# Altium PCB TIDA_010057.PcbDoc (part 1 of 9)
Units mil, origin at the board's own origin, x right, y up, seen from the top; angles counter-clockwise.
Board outline 1771.65 x 3543.31 mil, 12 copper layers (Top Layer, GND1, Signal Layer 1, GND2, POWER1, POWER2, GND4, POWER3, GND6, Signal Layer 2, GND7, Bottom Layer), stack 62.79 mil thick; 593 components, 374 nets, 1805 pads, 1029 vias.
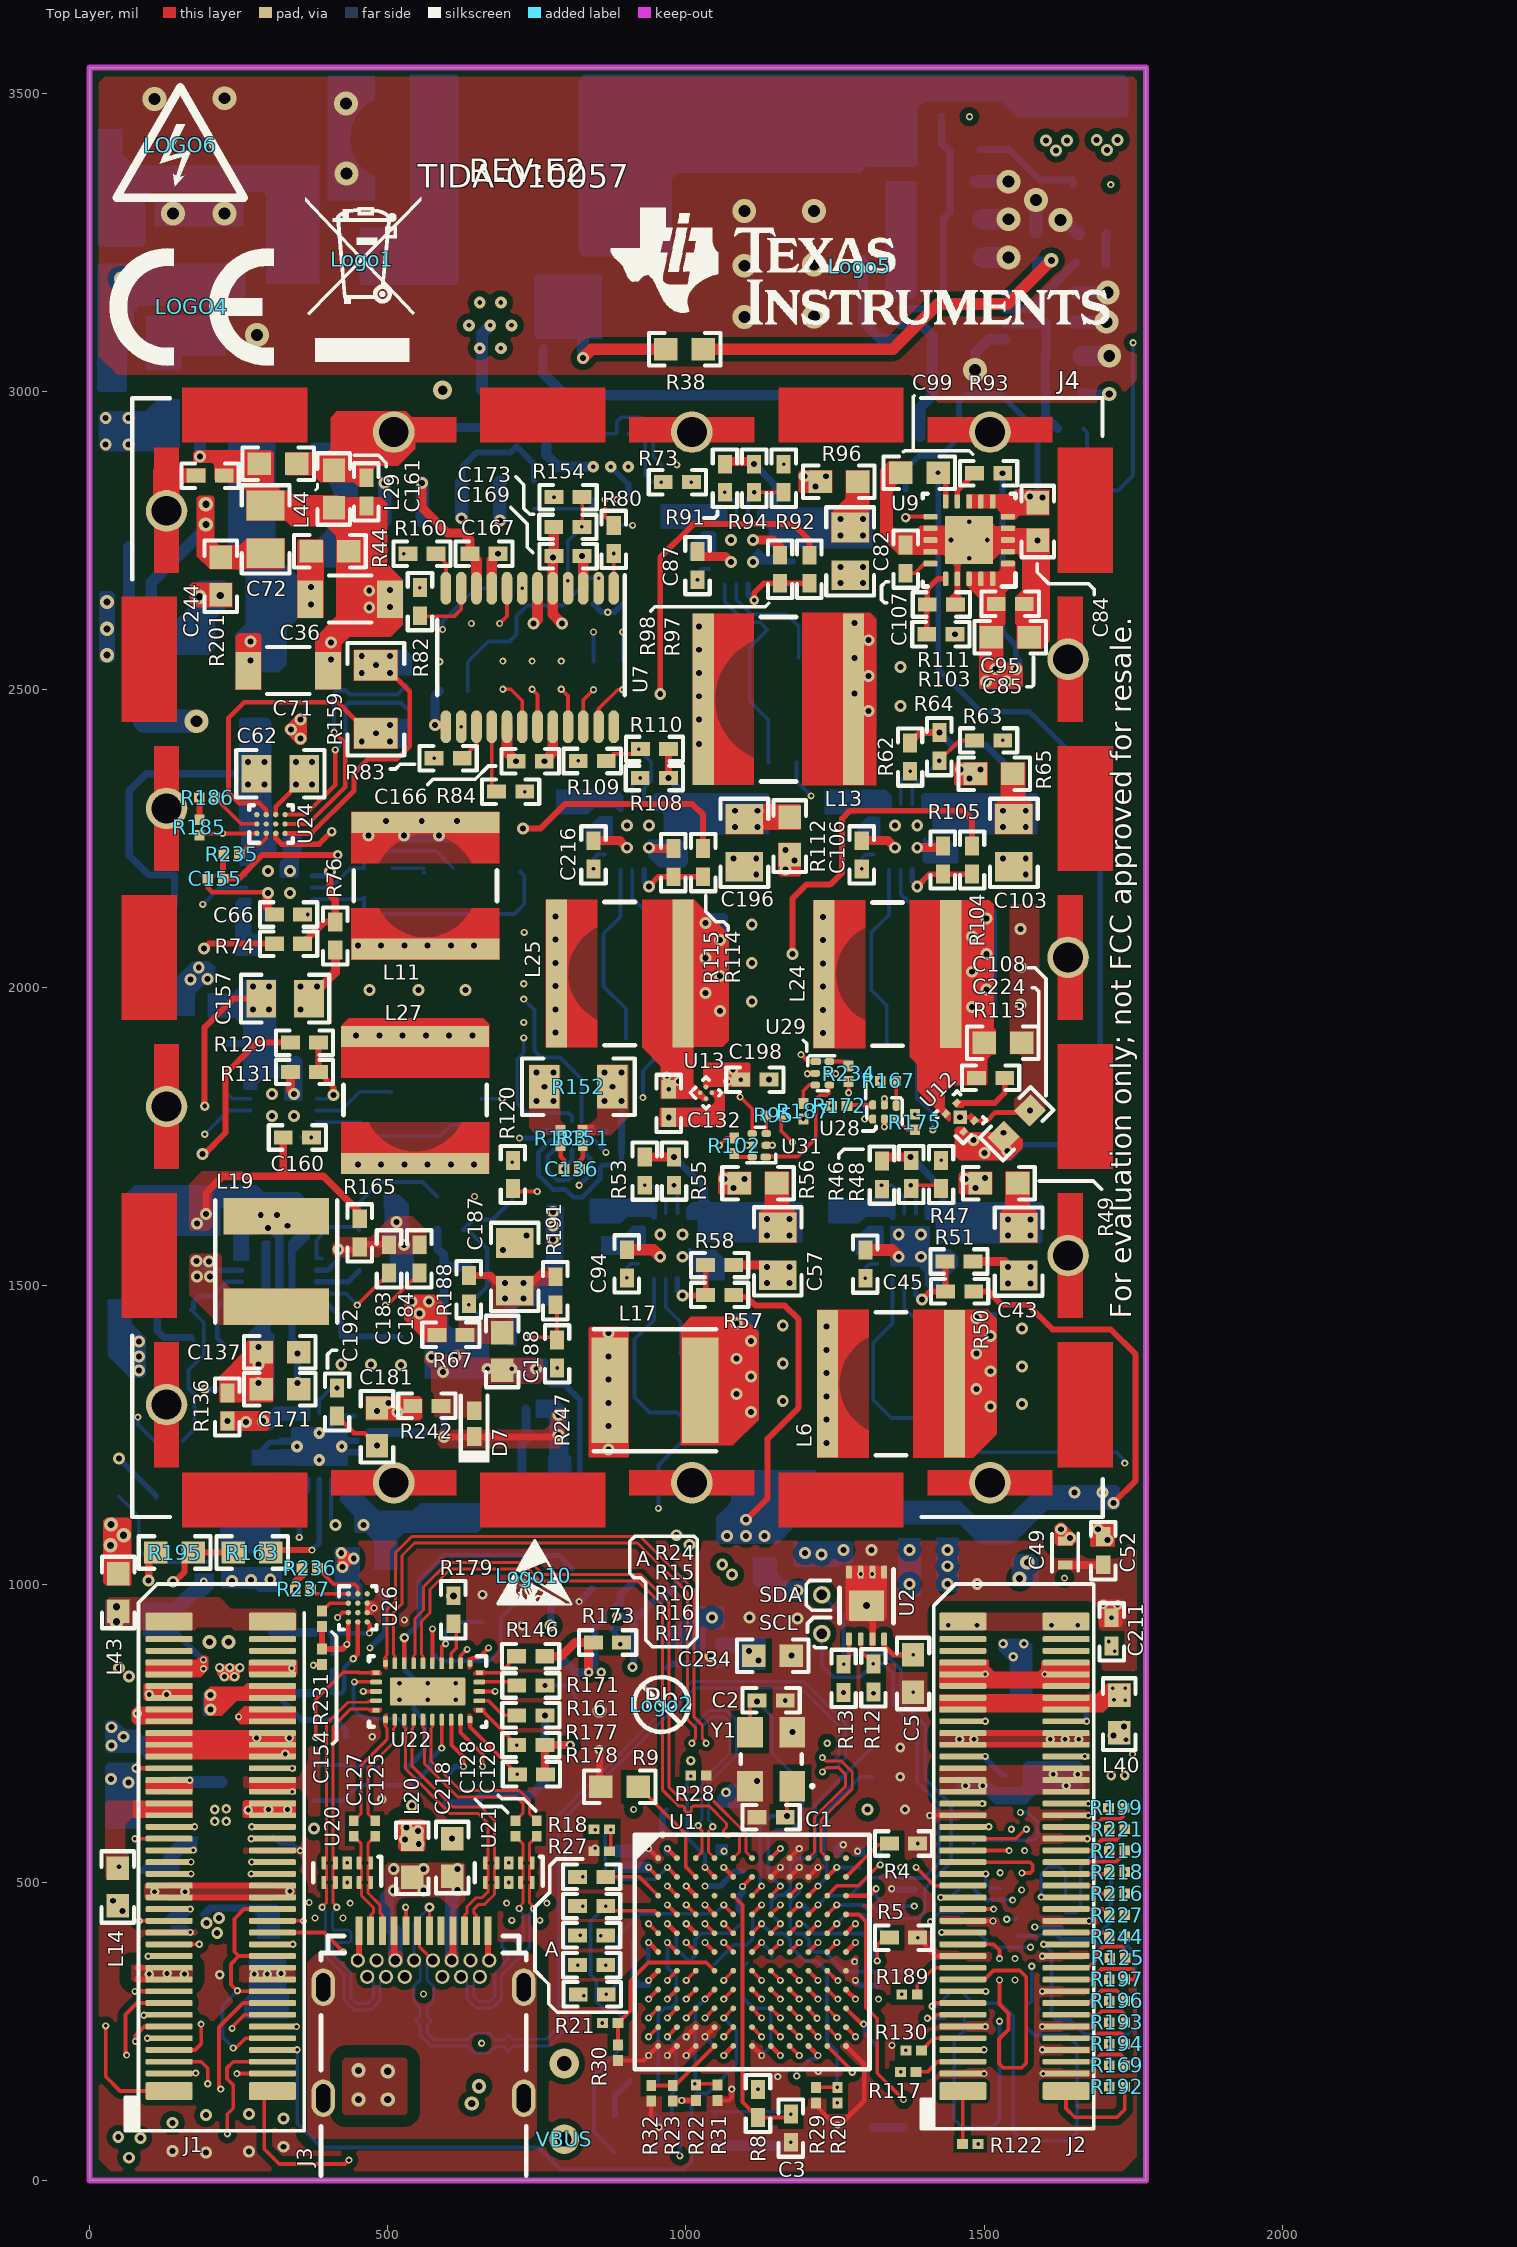
[diagram p0: Top Layer view]
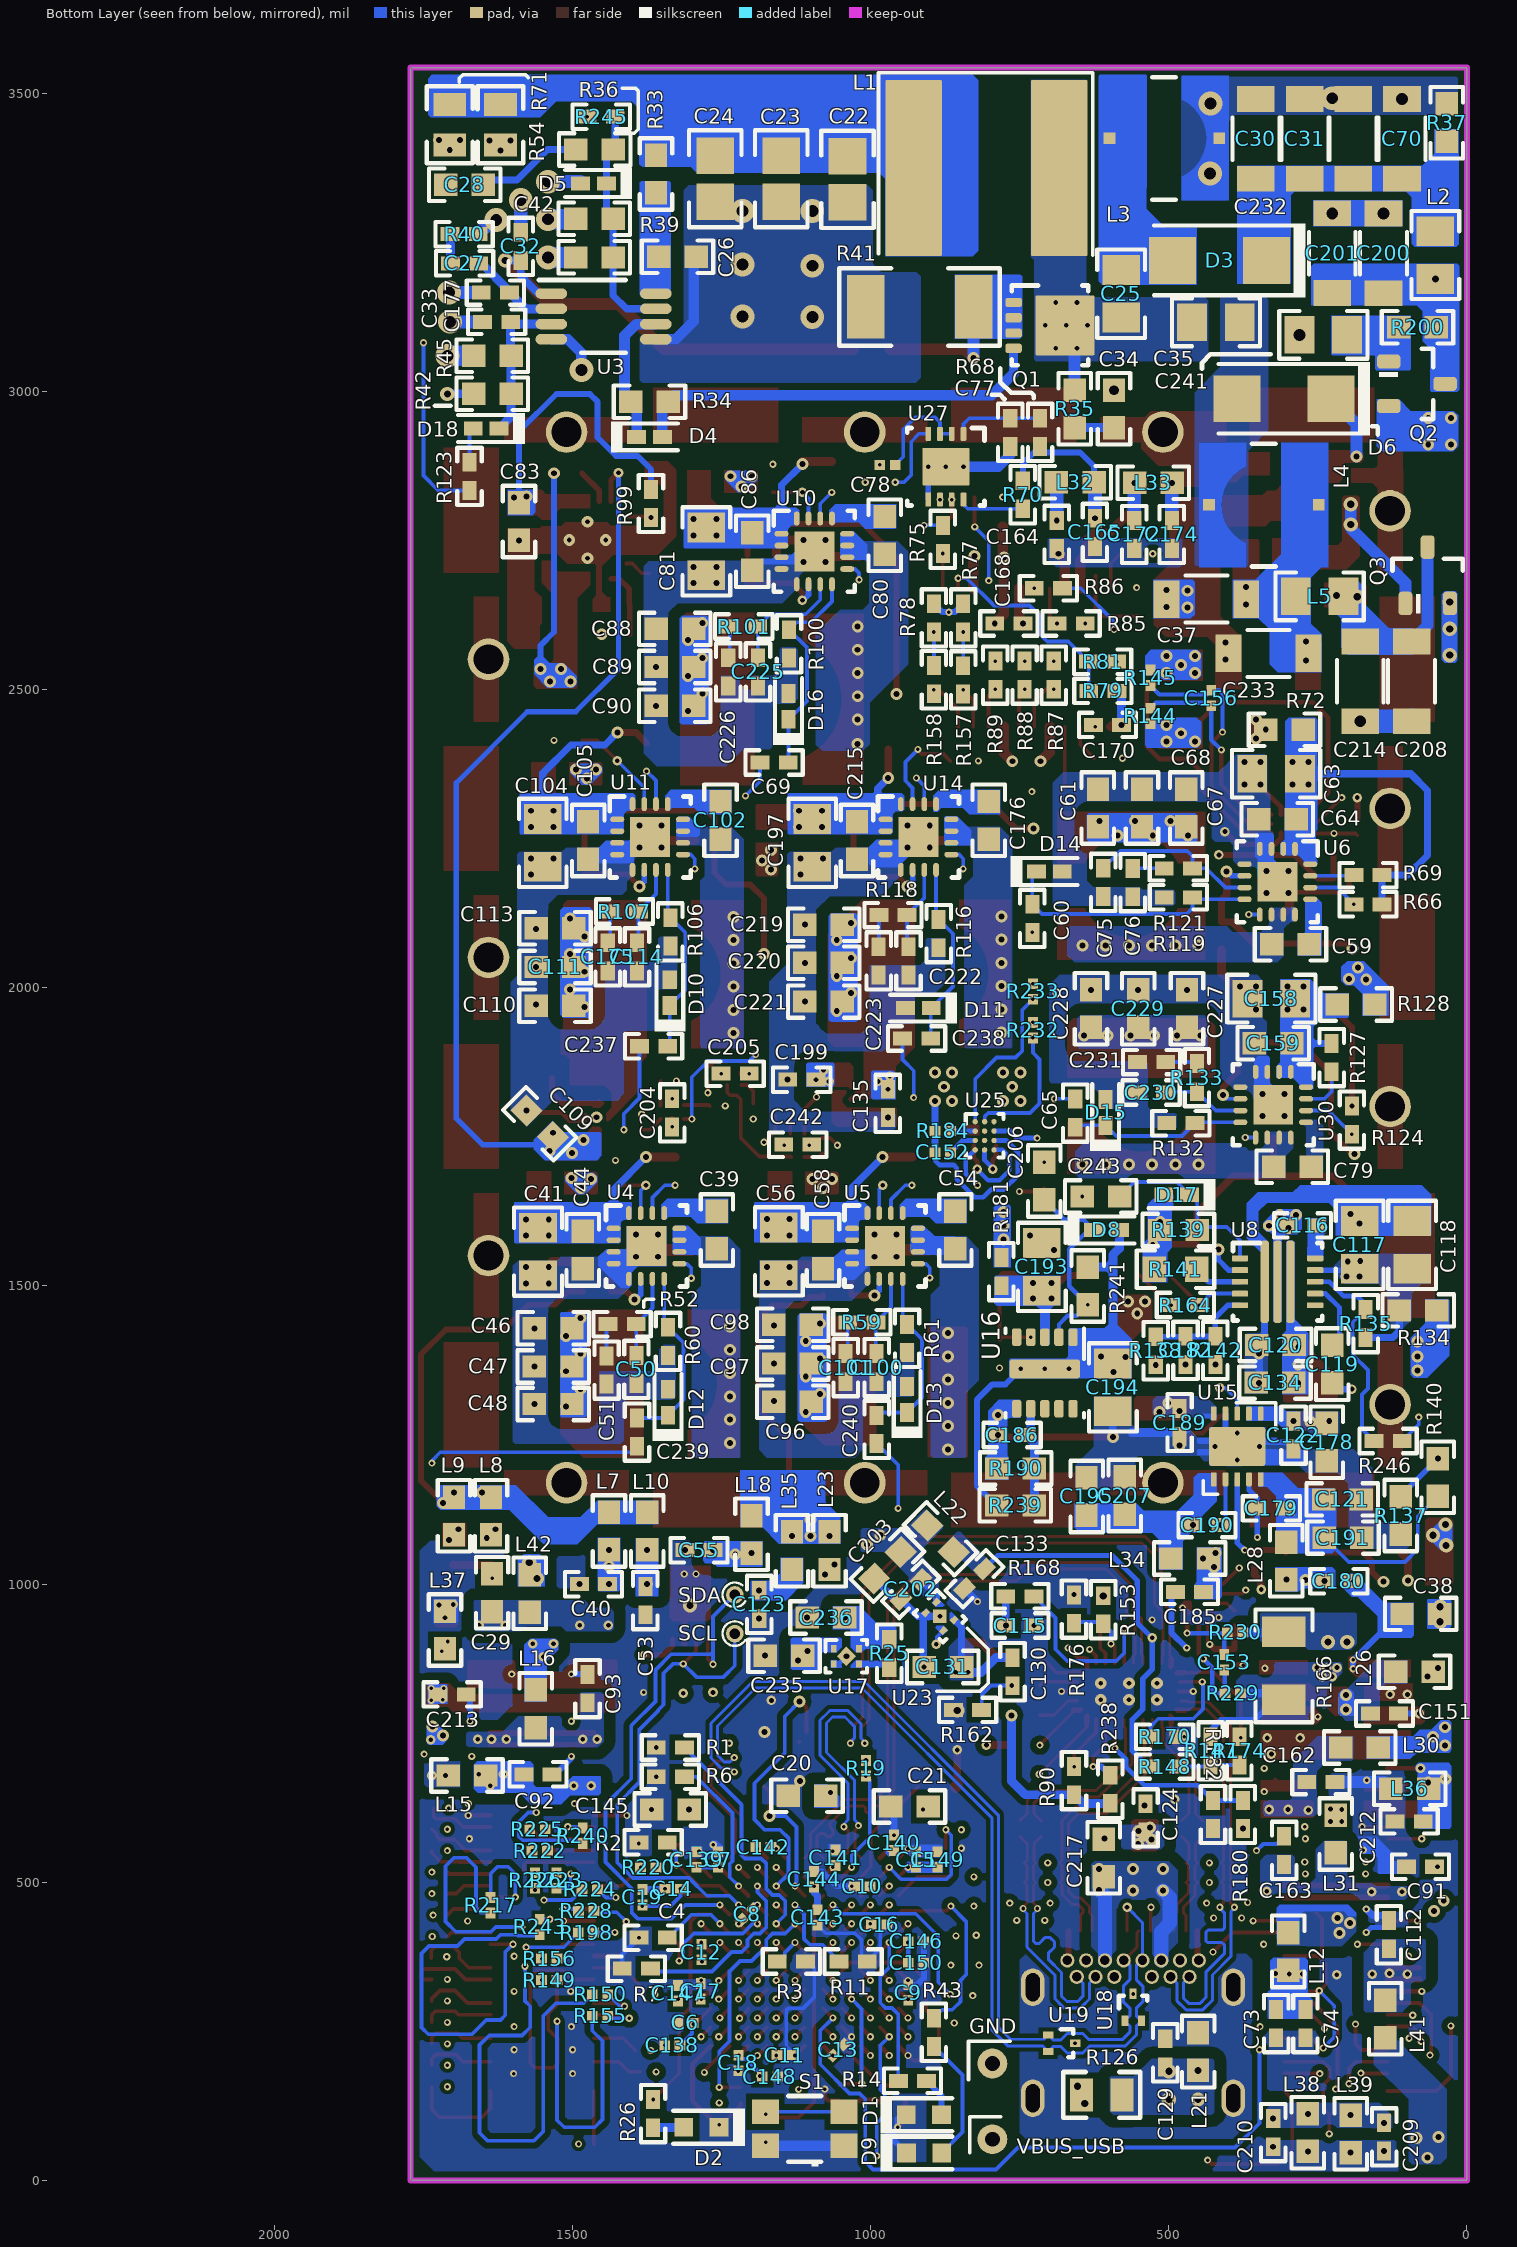
[diagram p1: Bottom Layer view, seen from below]
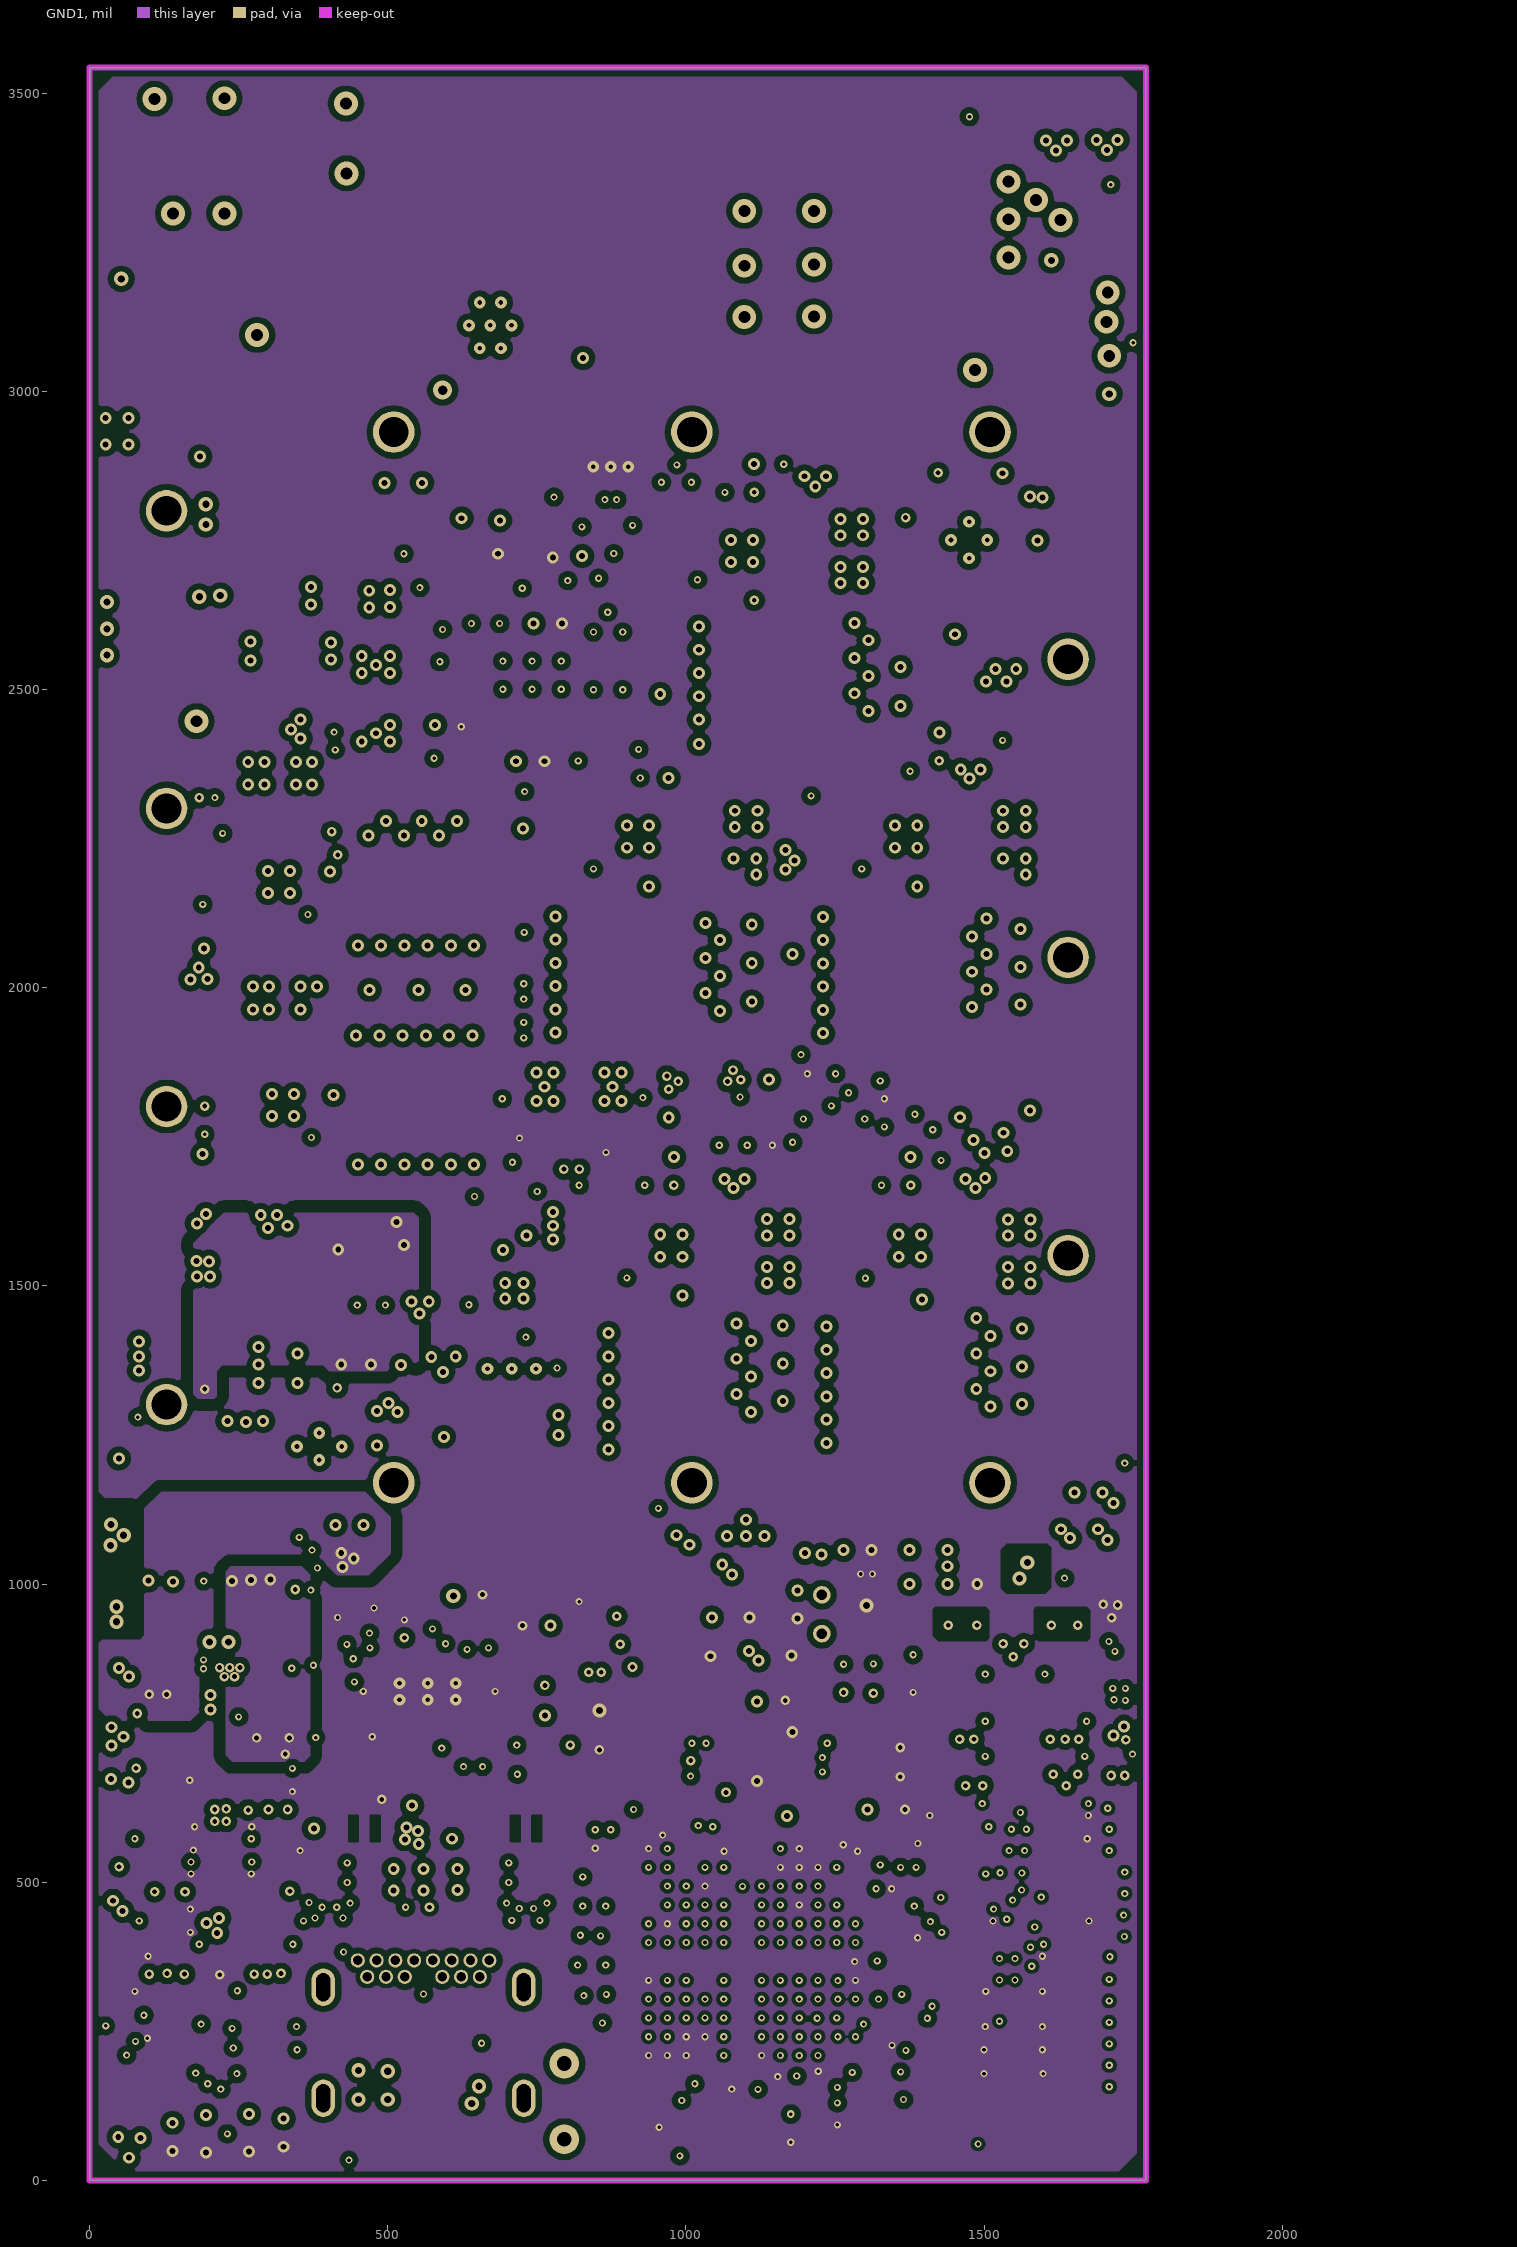
[diagram p2: GND1]
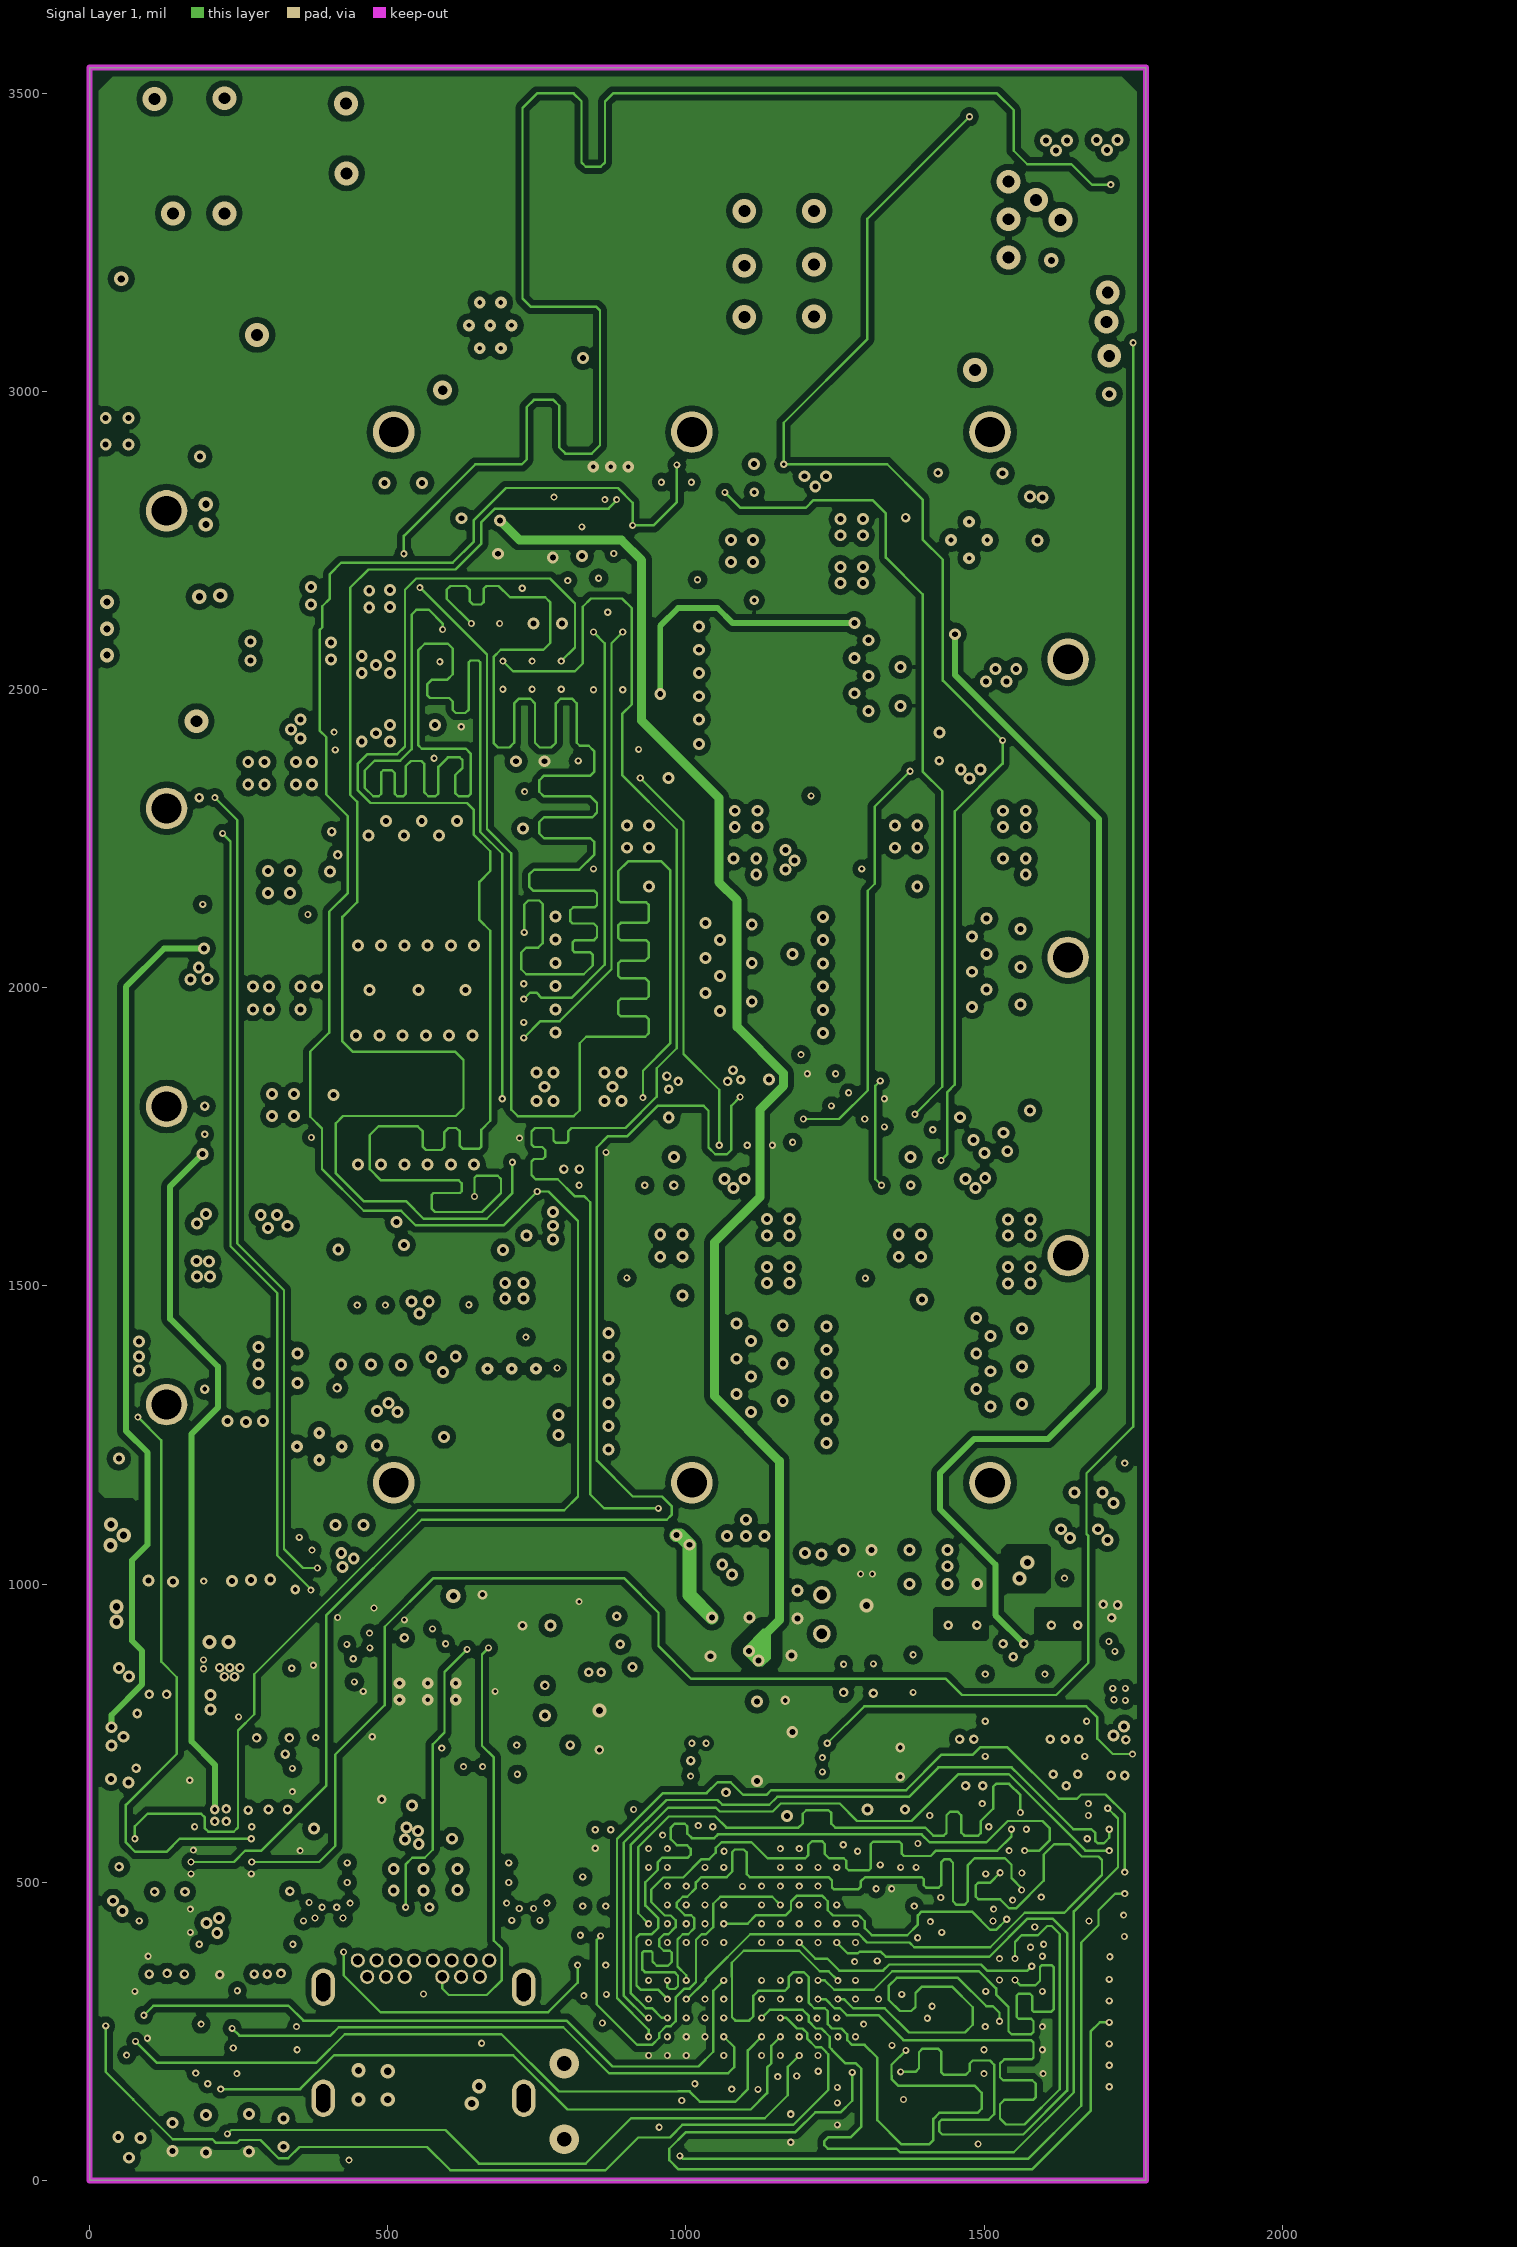
[diagram p3: Signal Layer 1]
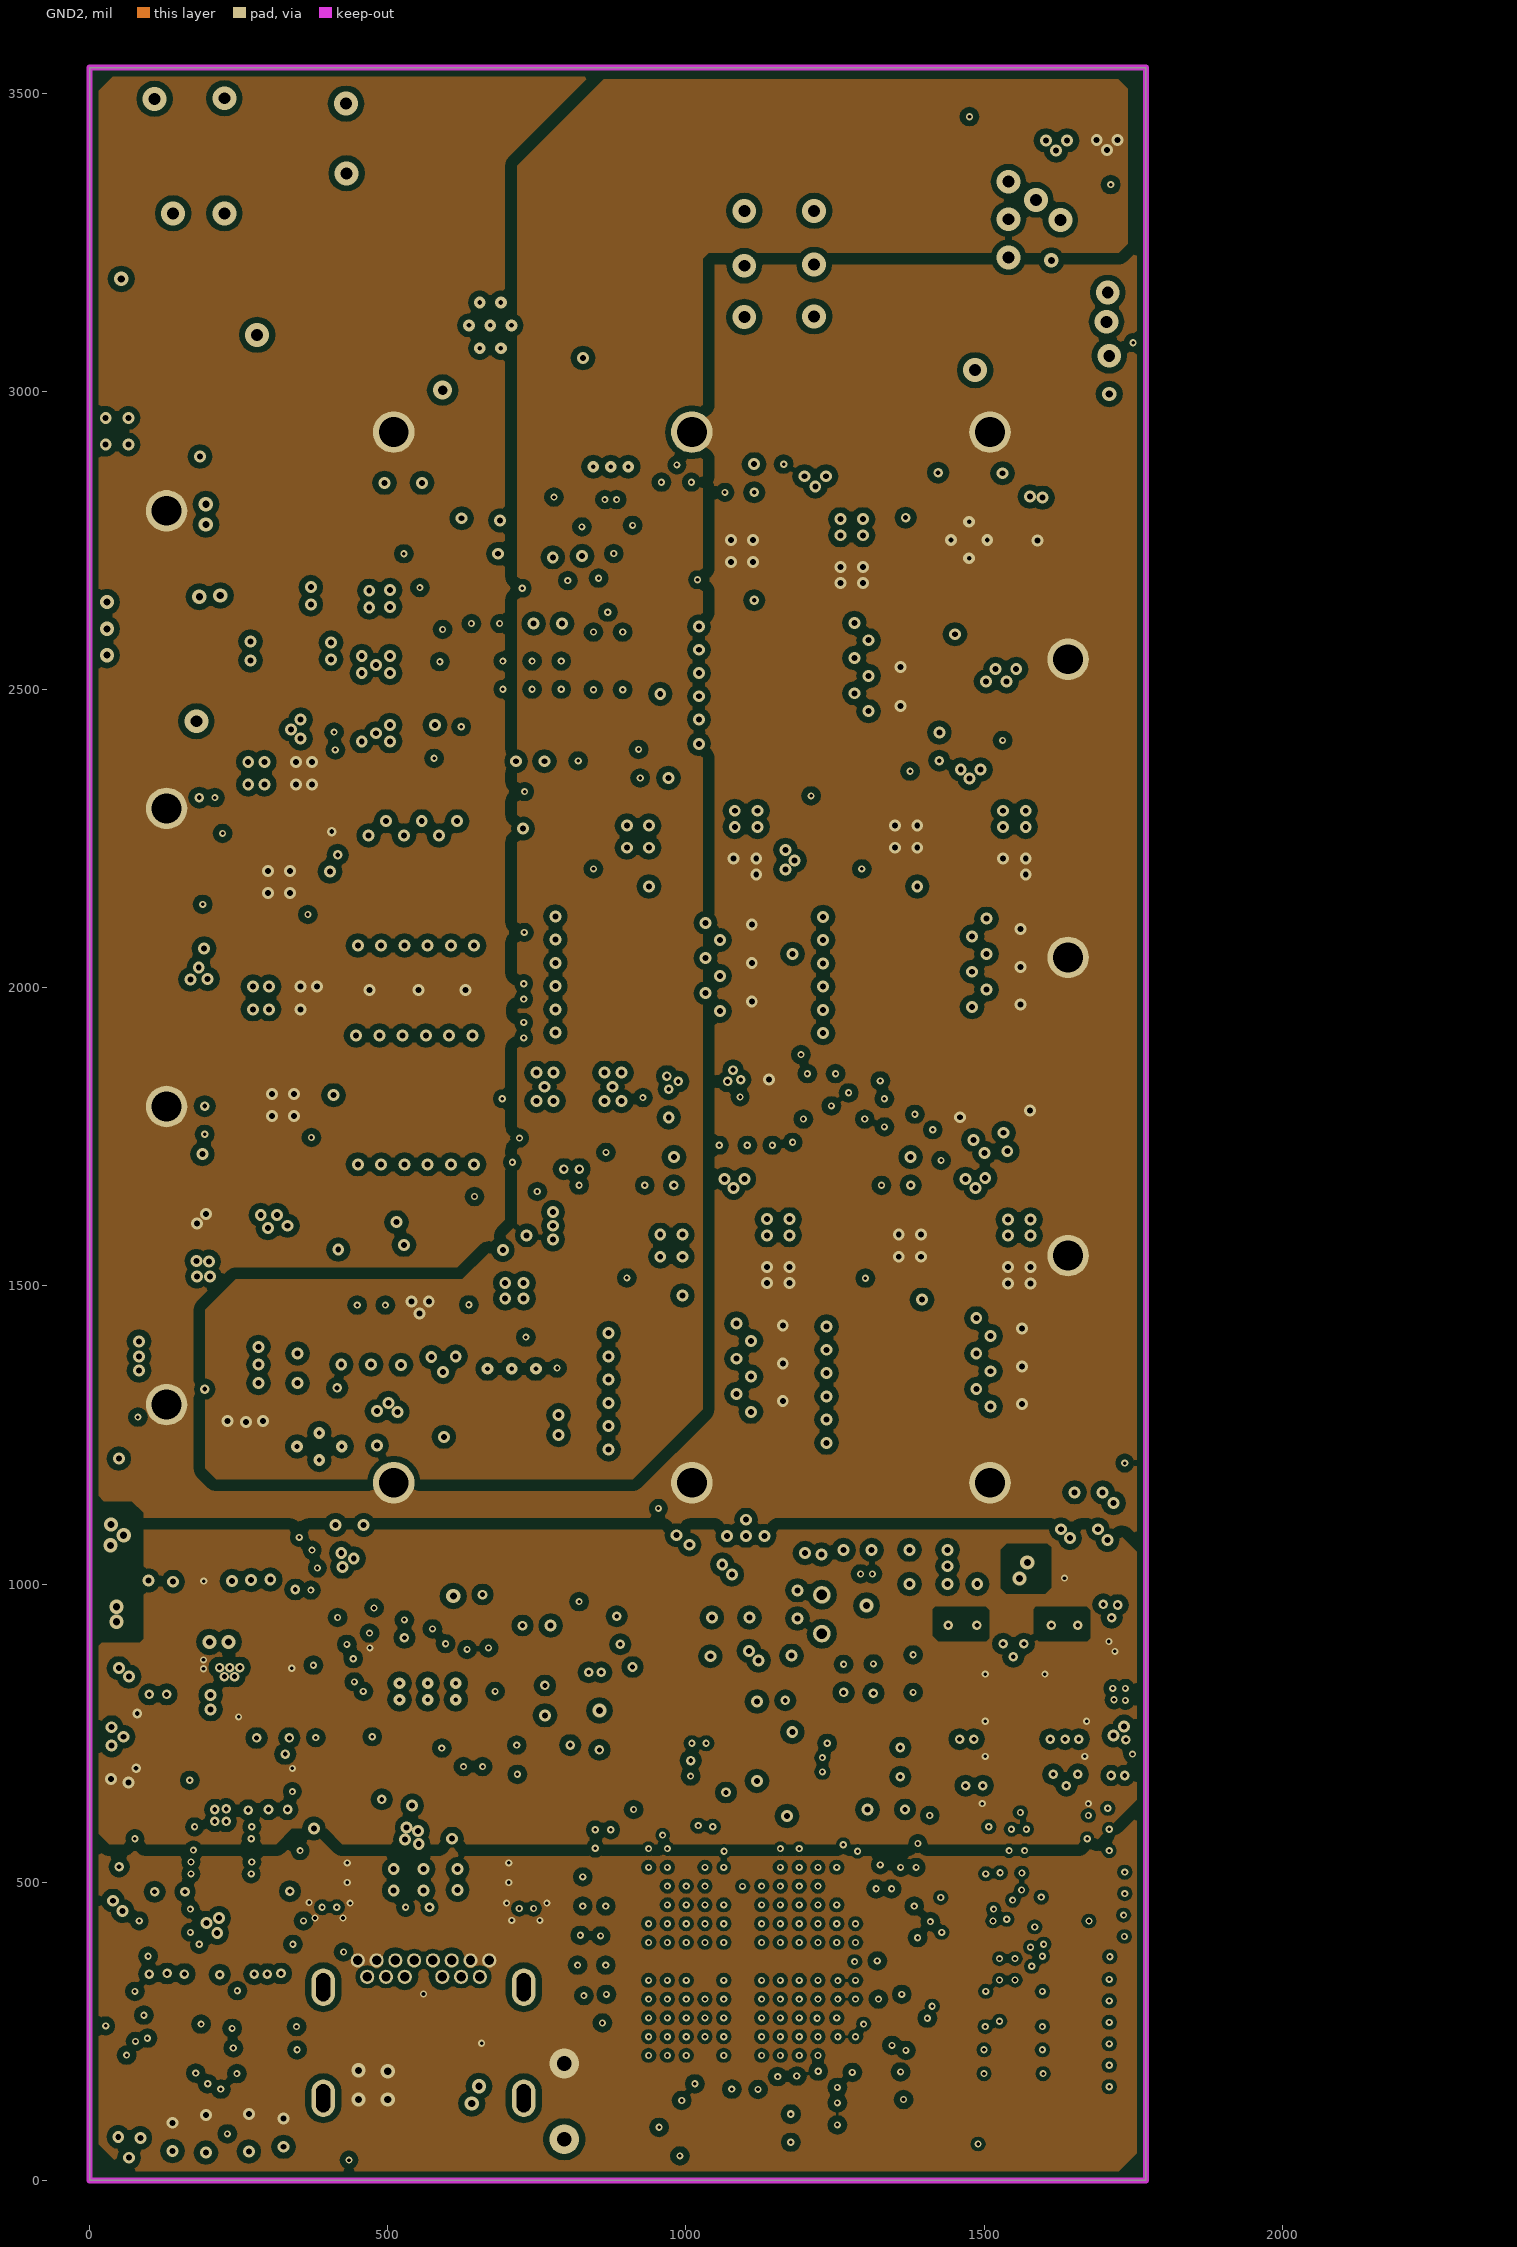
[diagram p4: GND2]
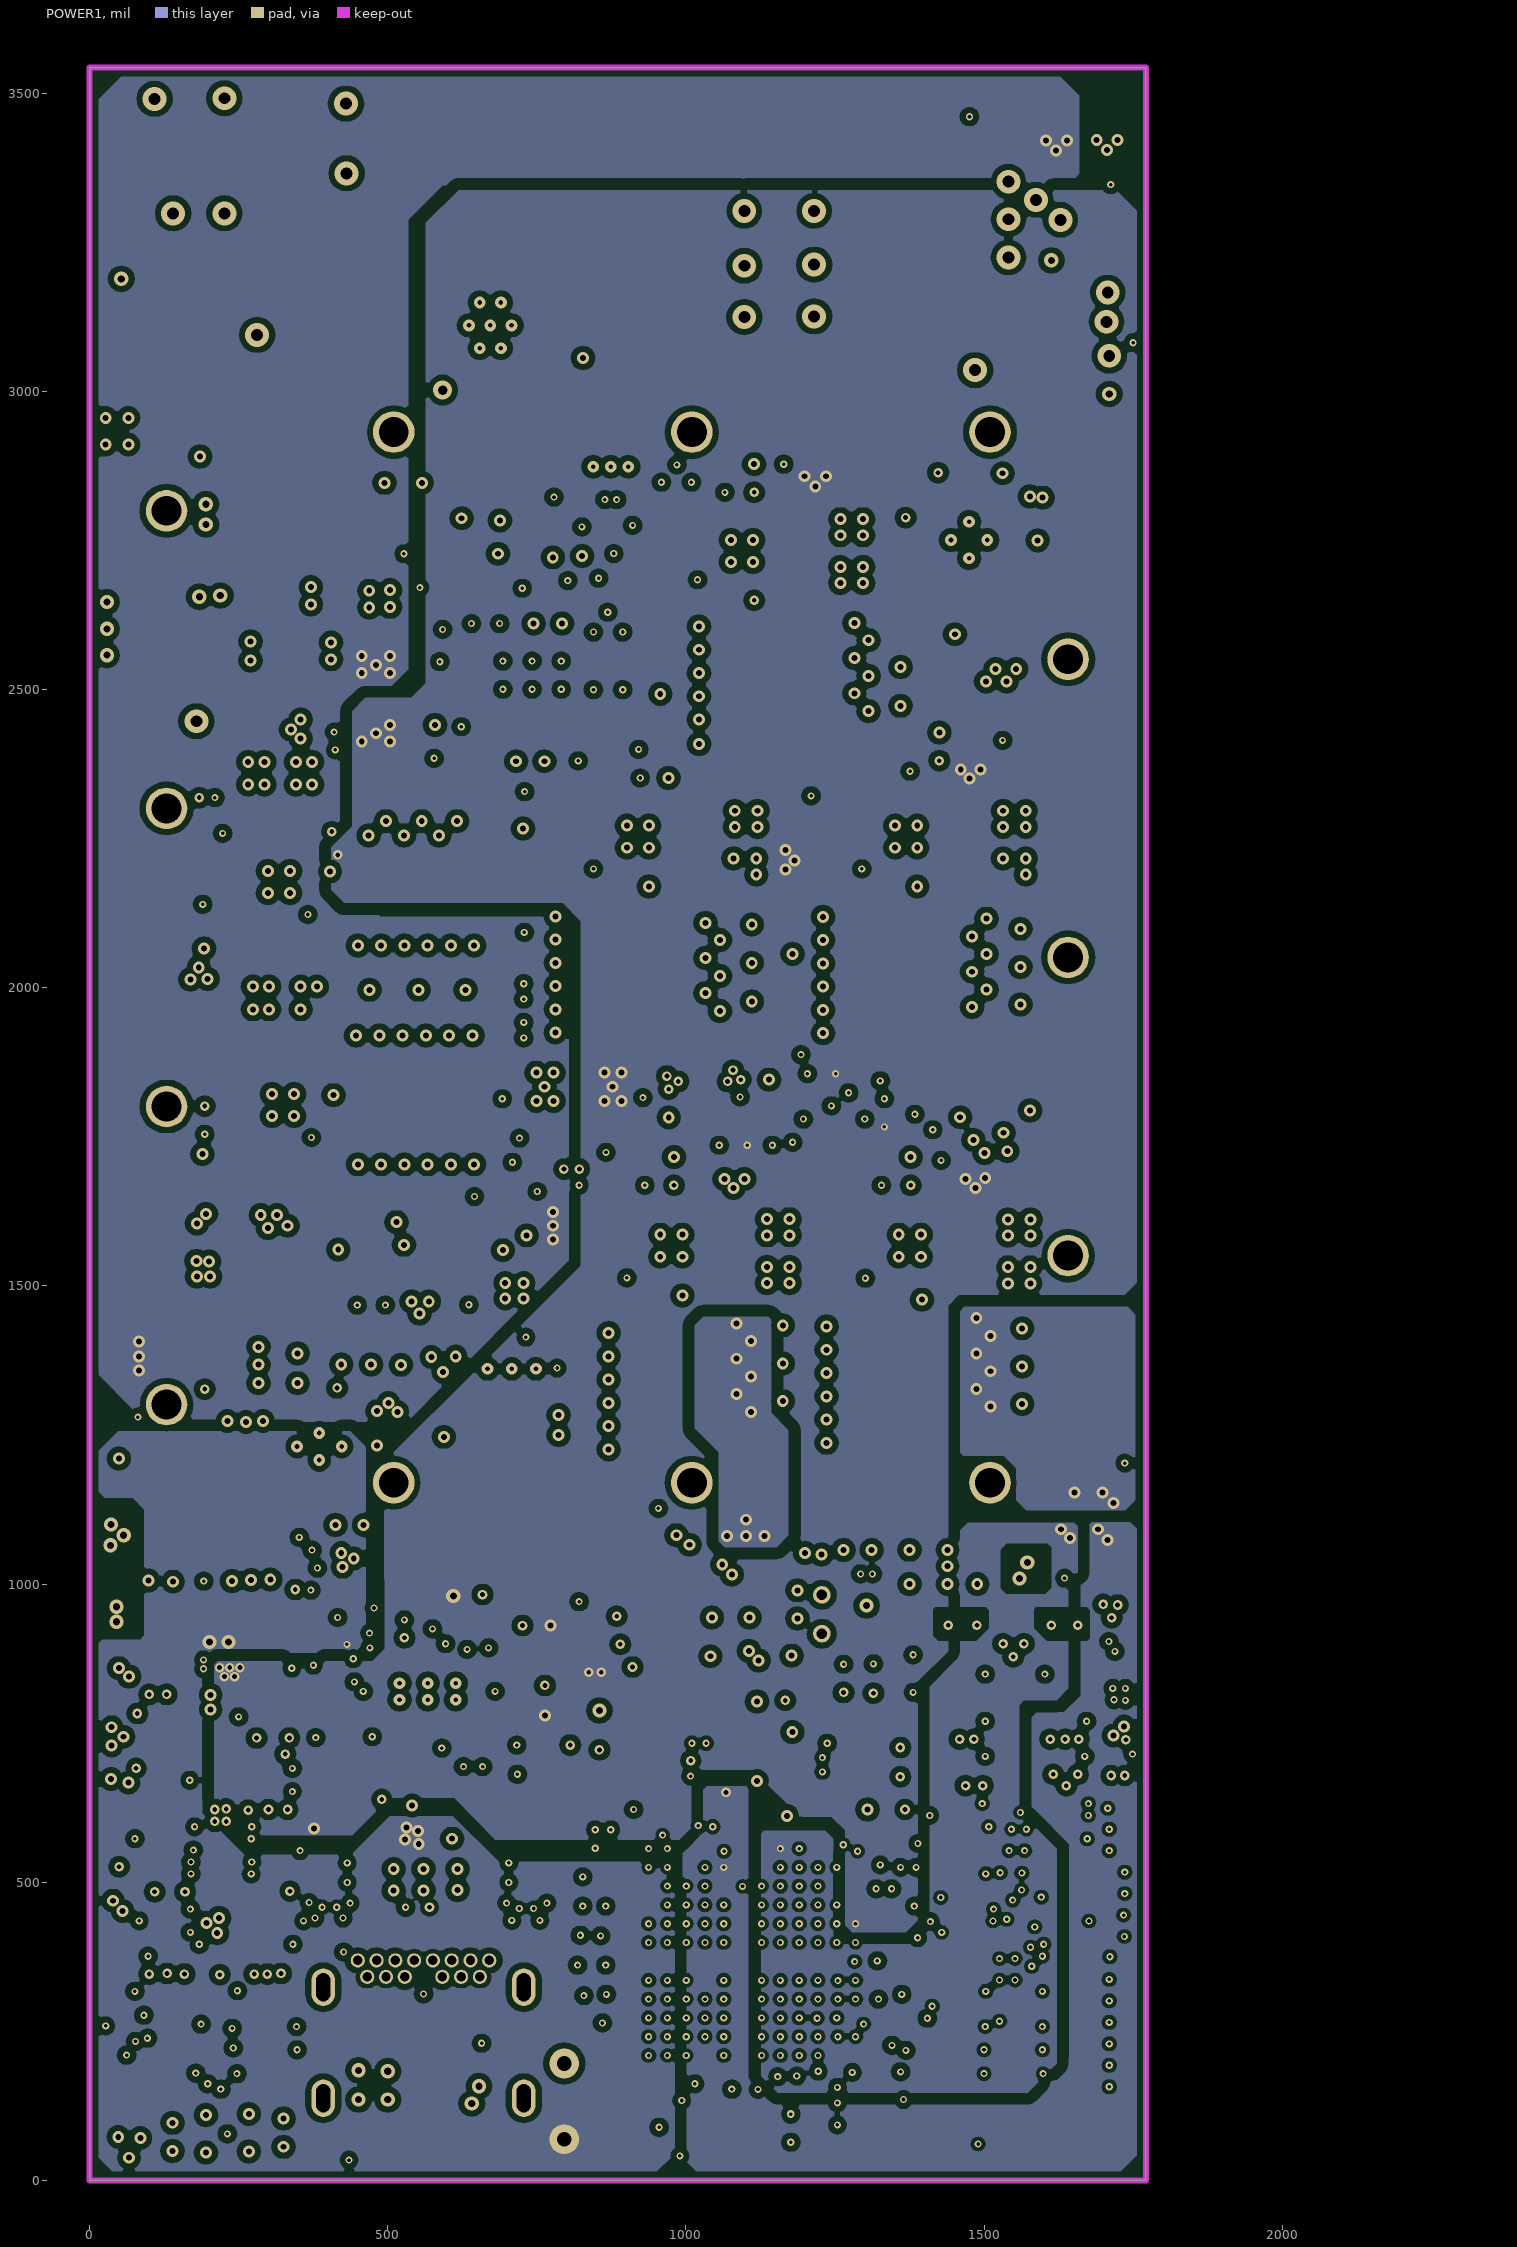
[diagram p5: POWER1]
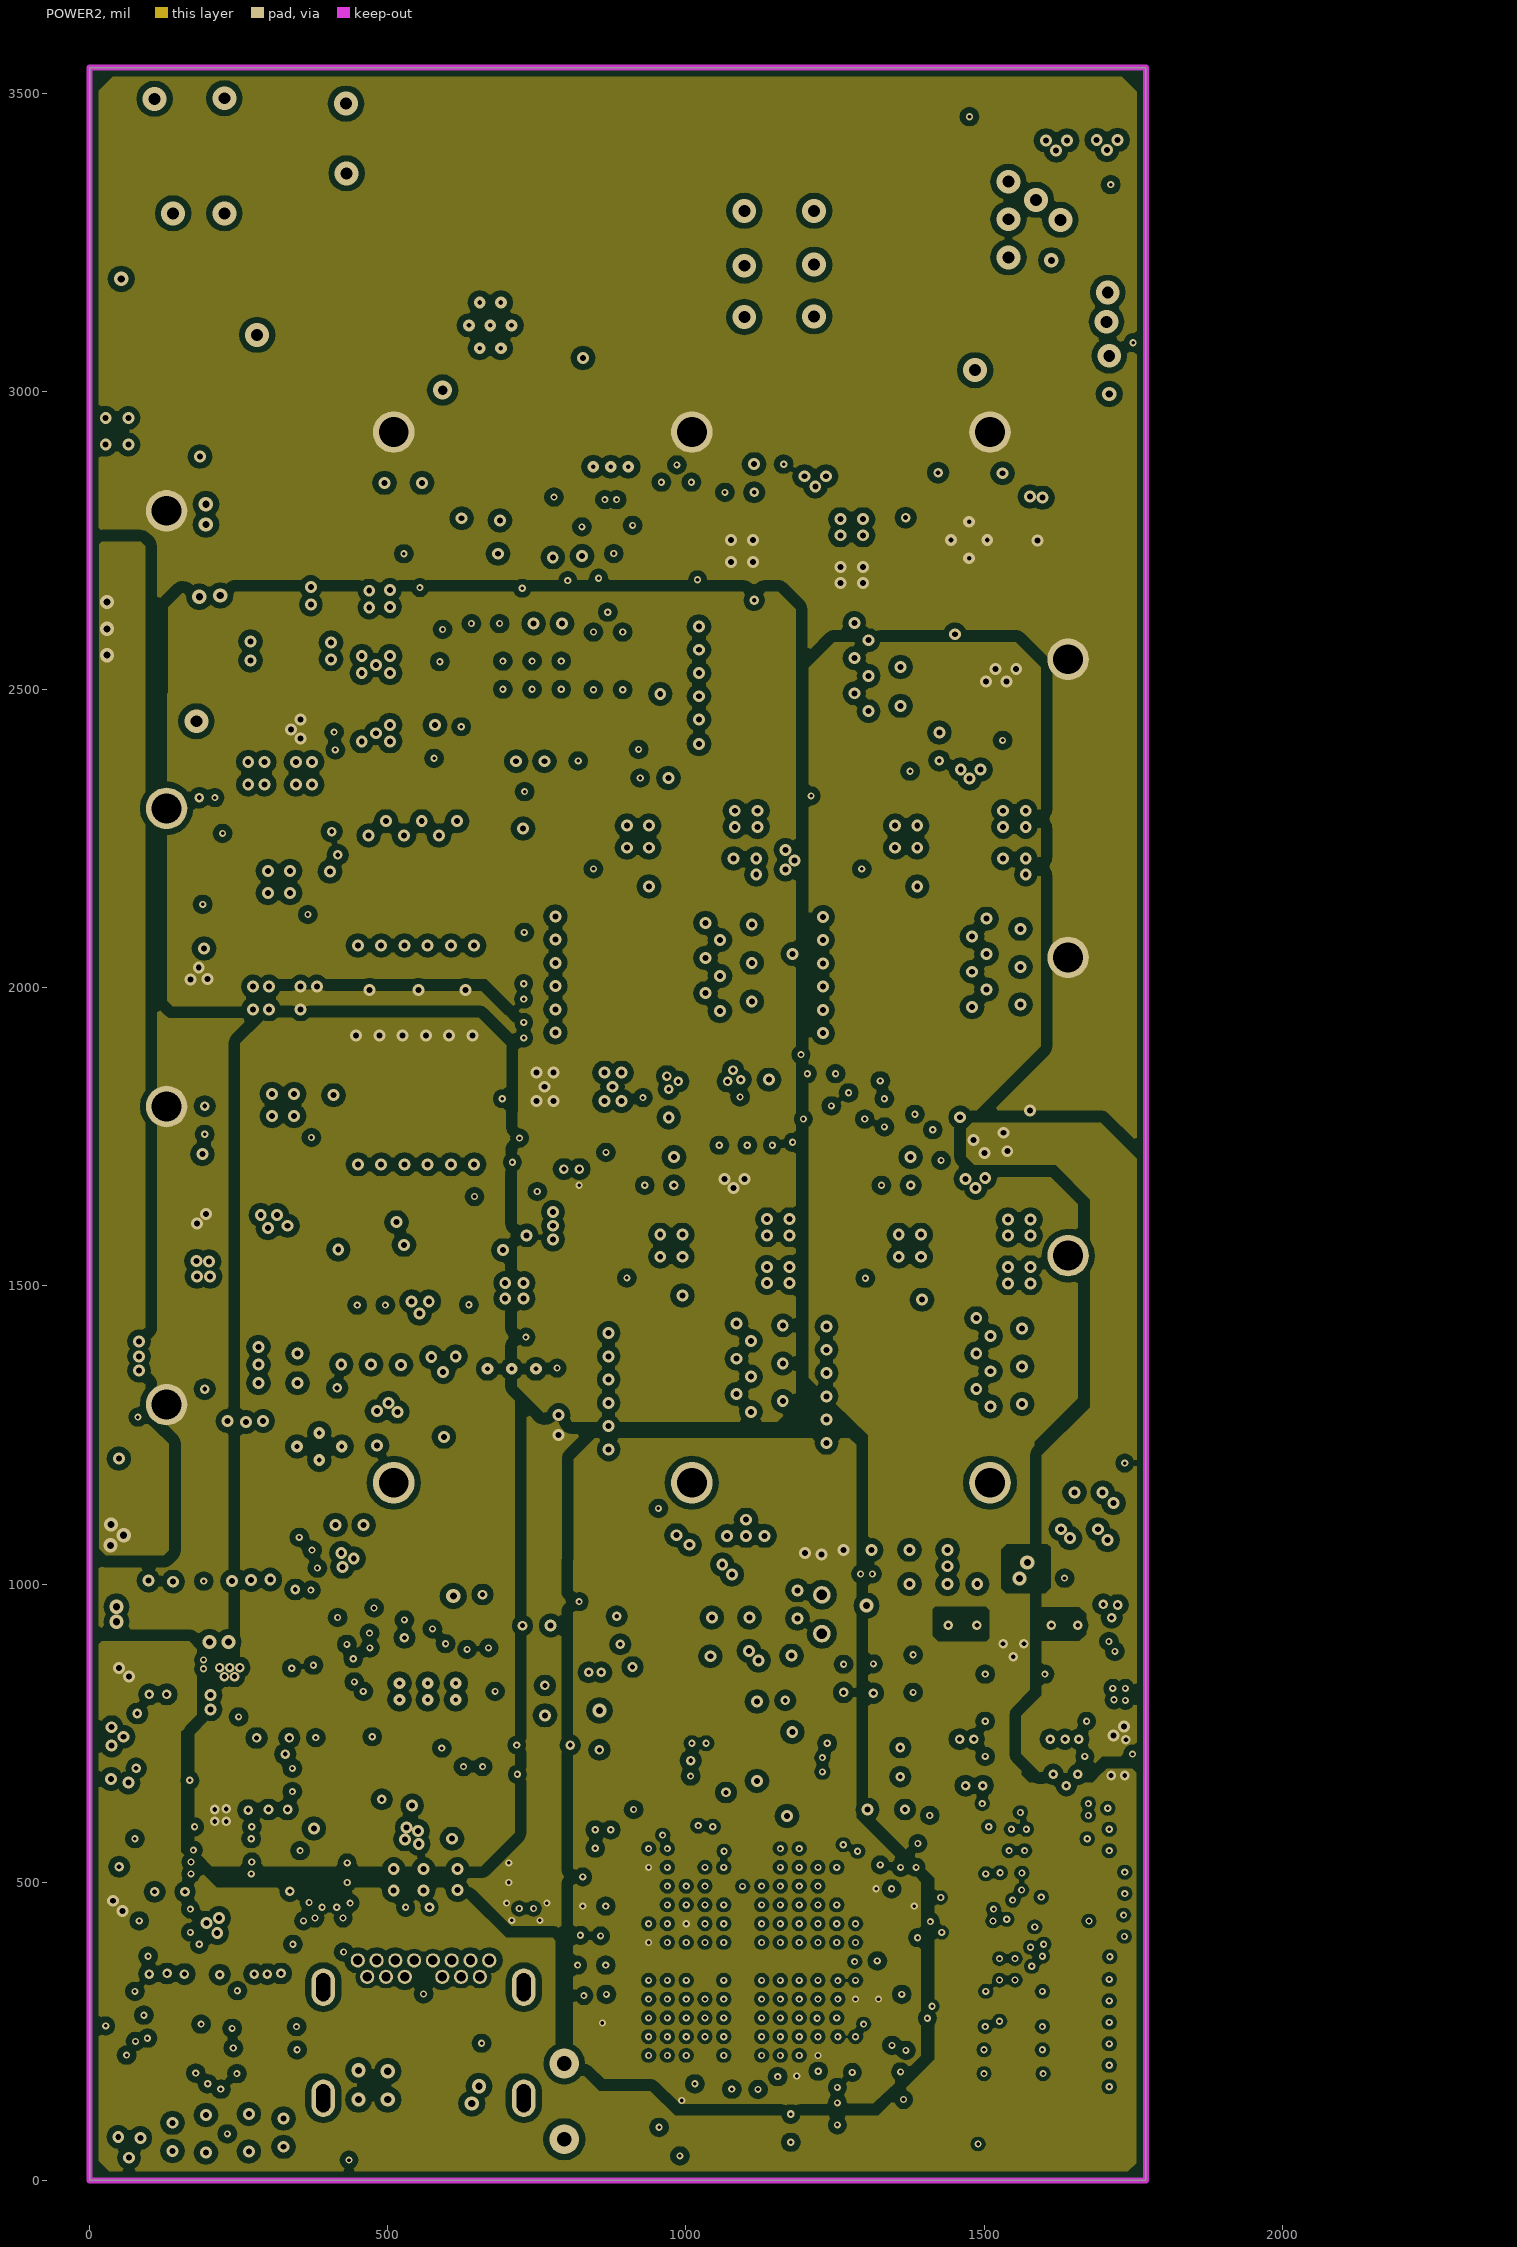
[diagram p6: POWER2]
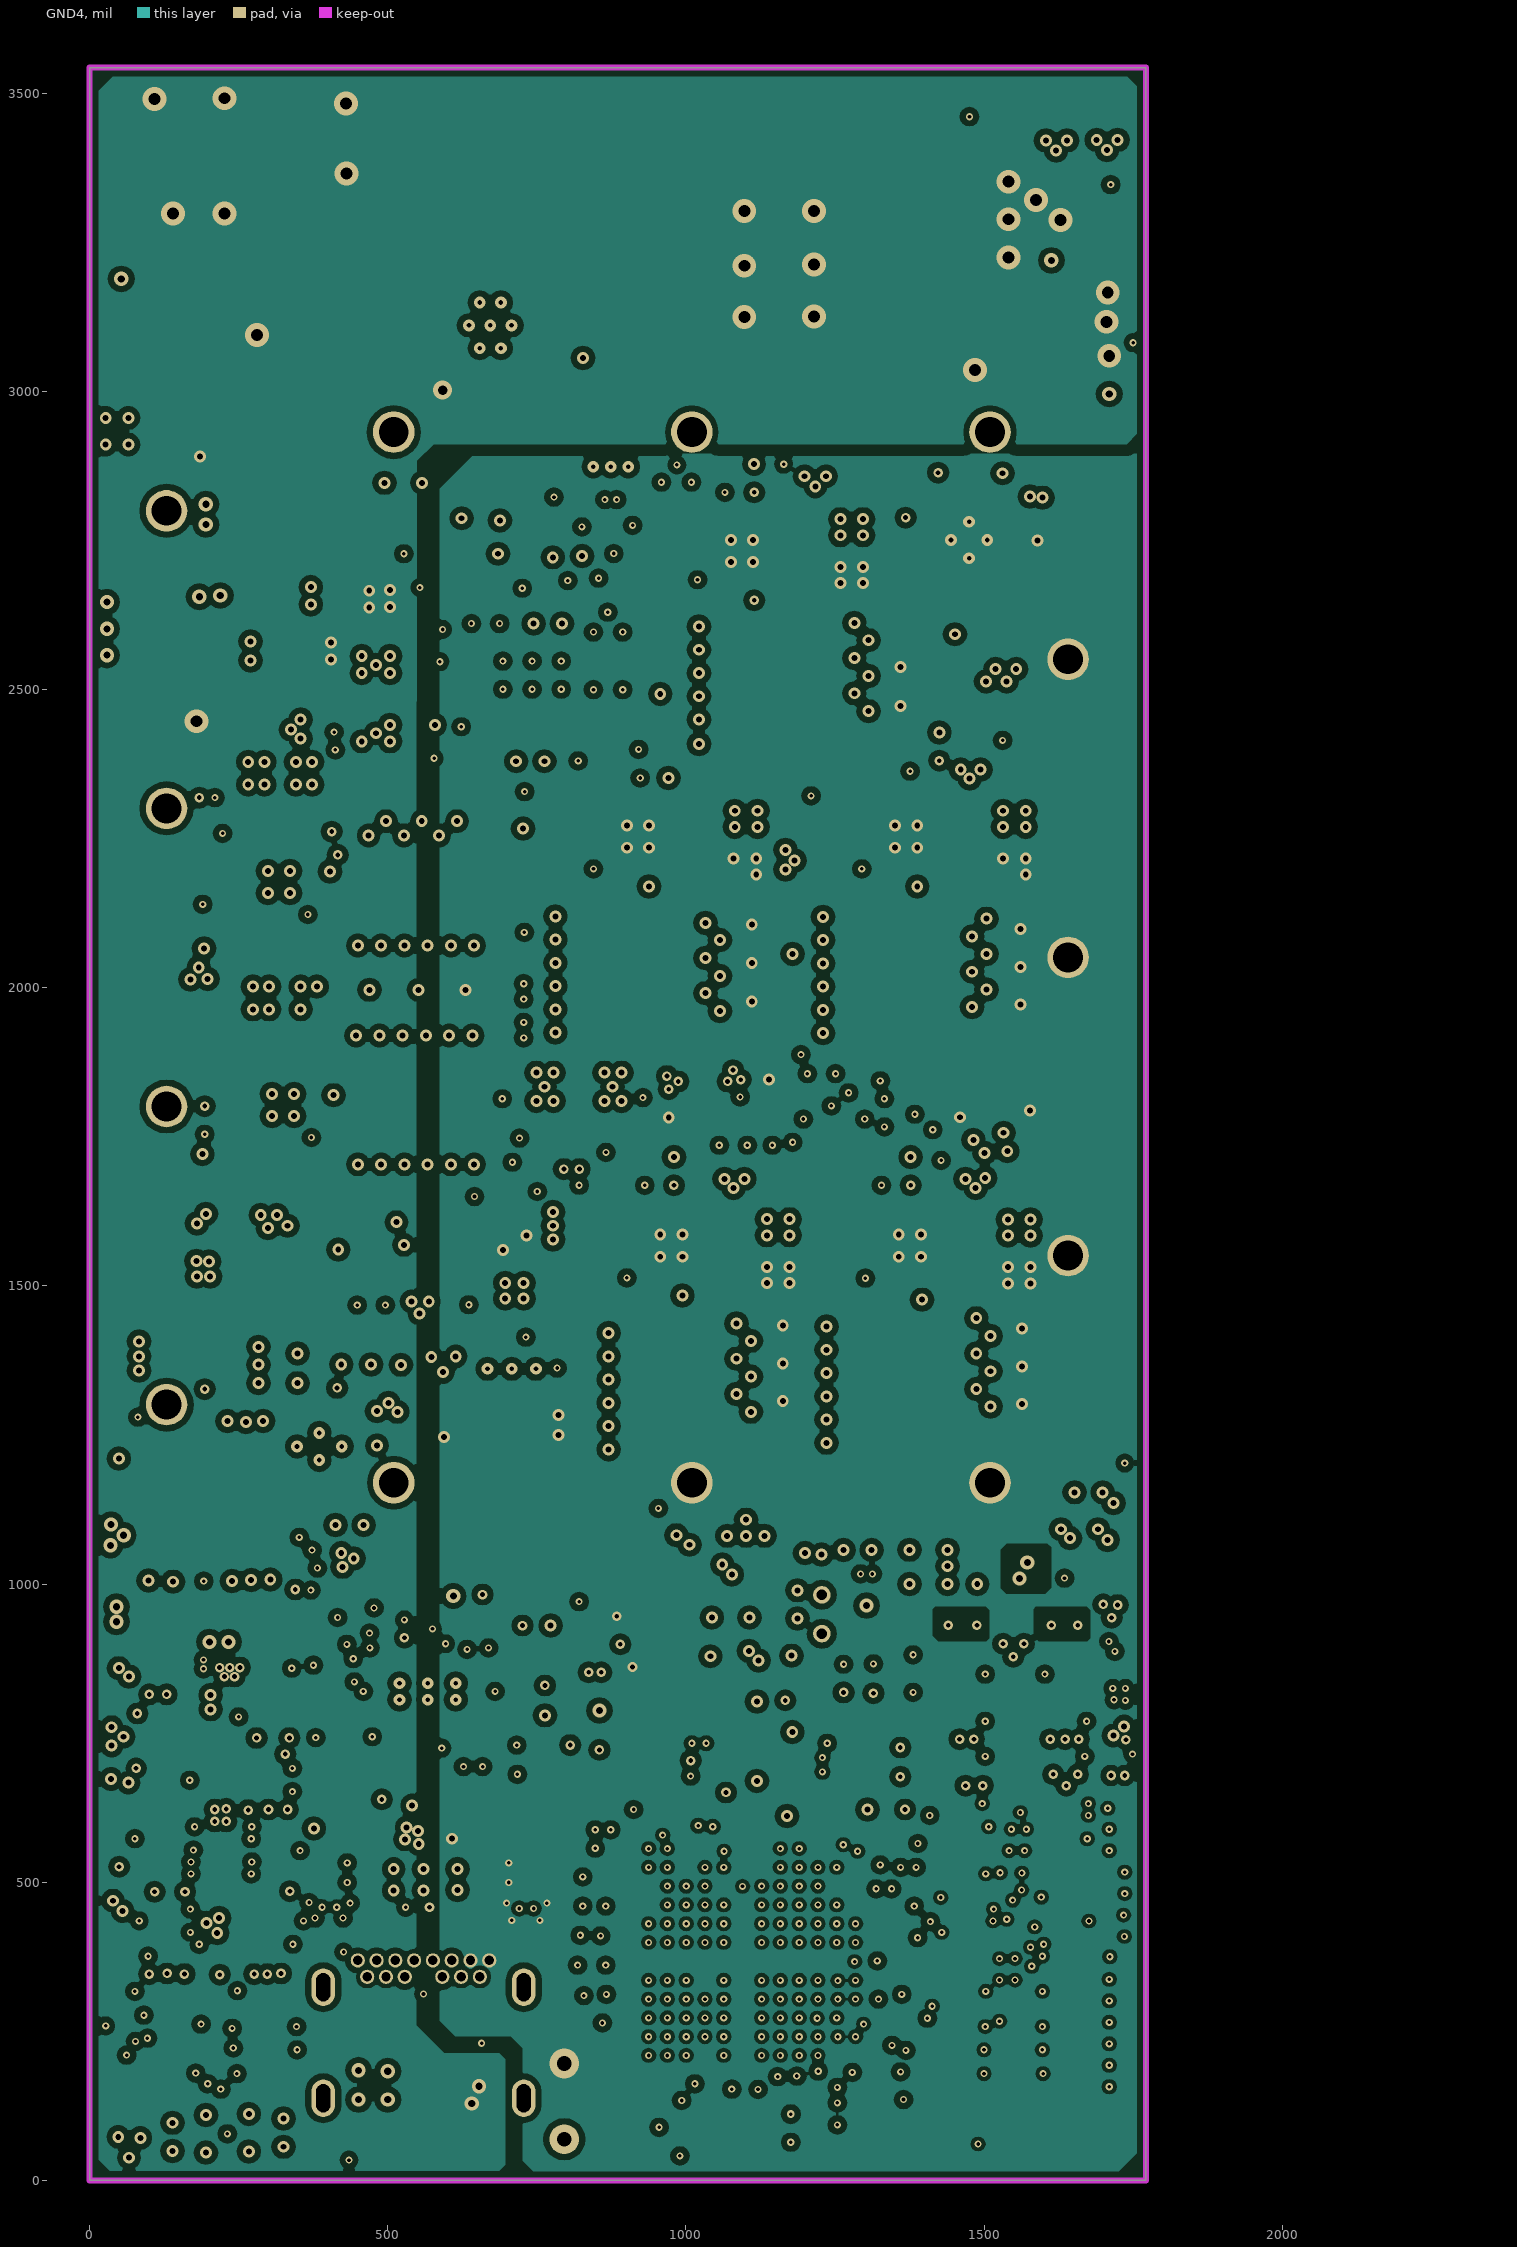
[diagram p7: GND4]
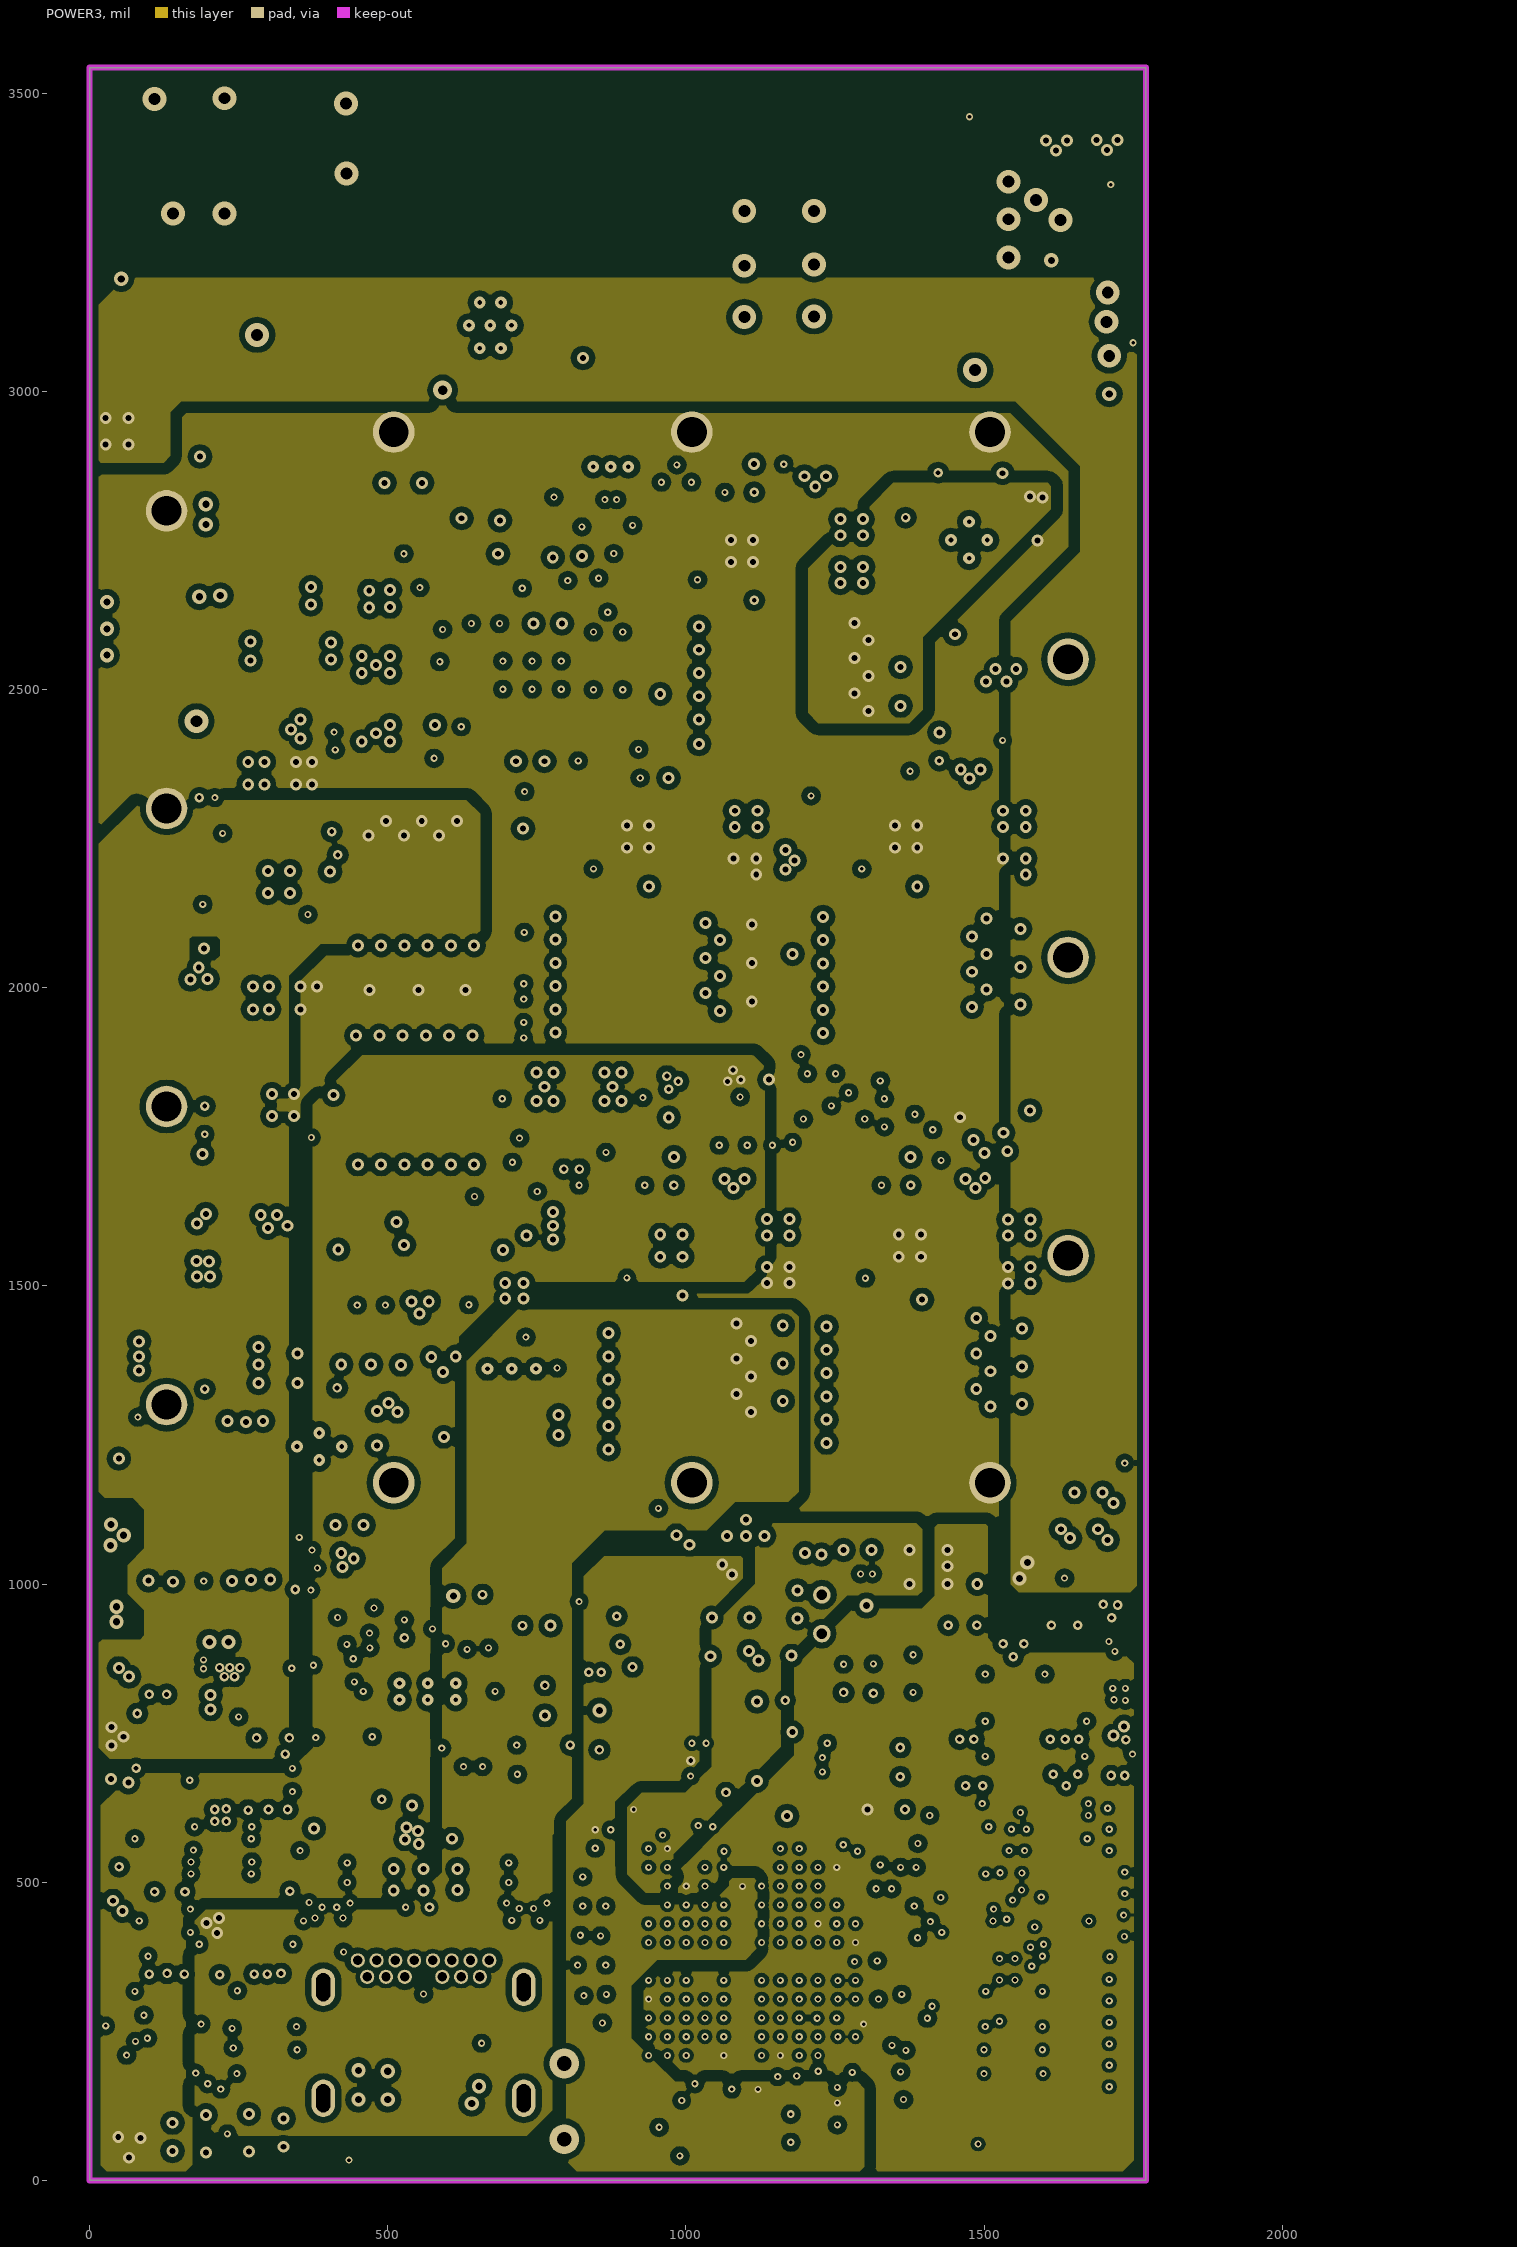
[diagram p8: POWER3]
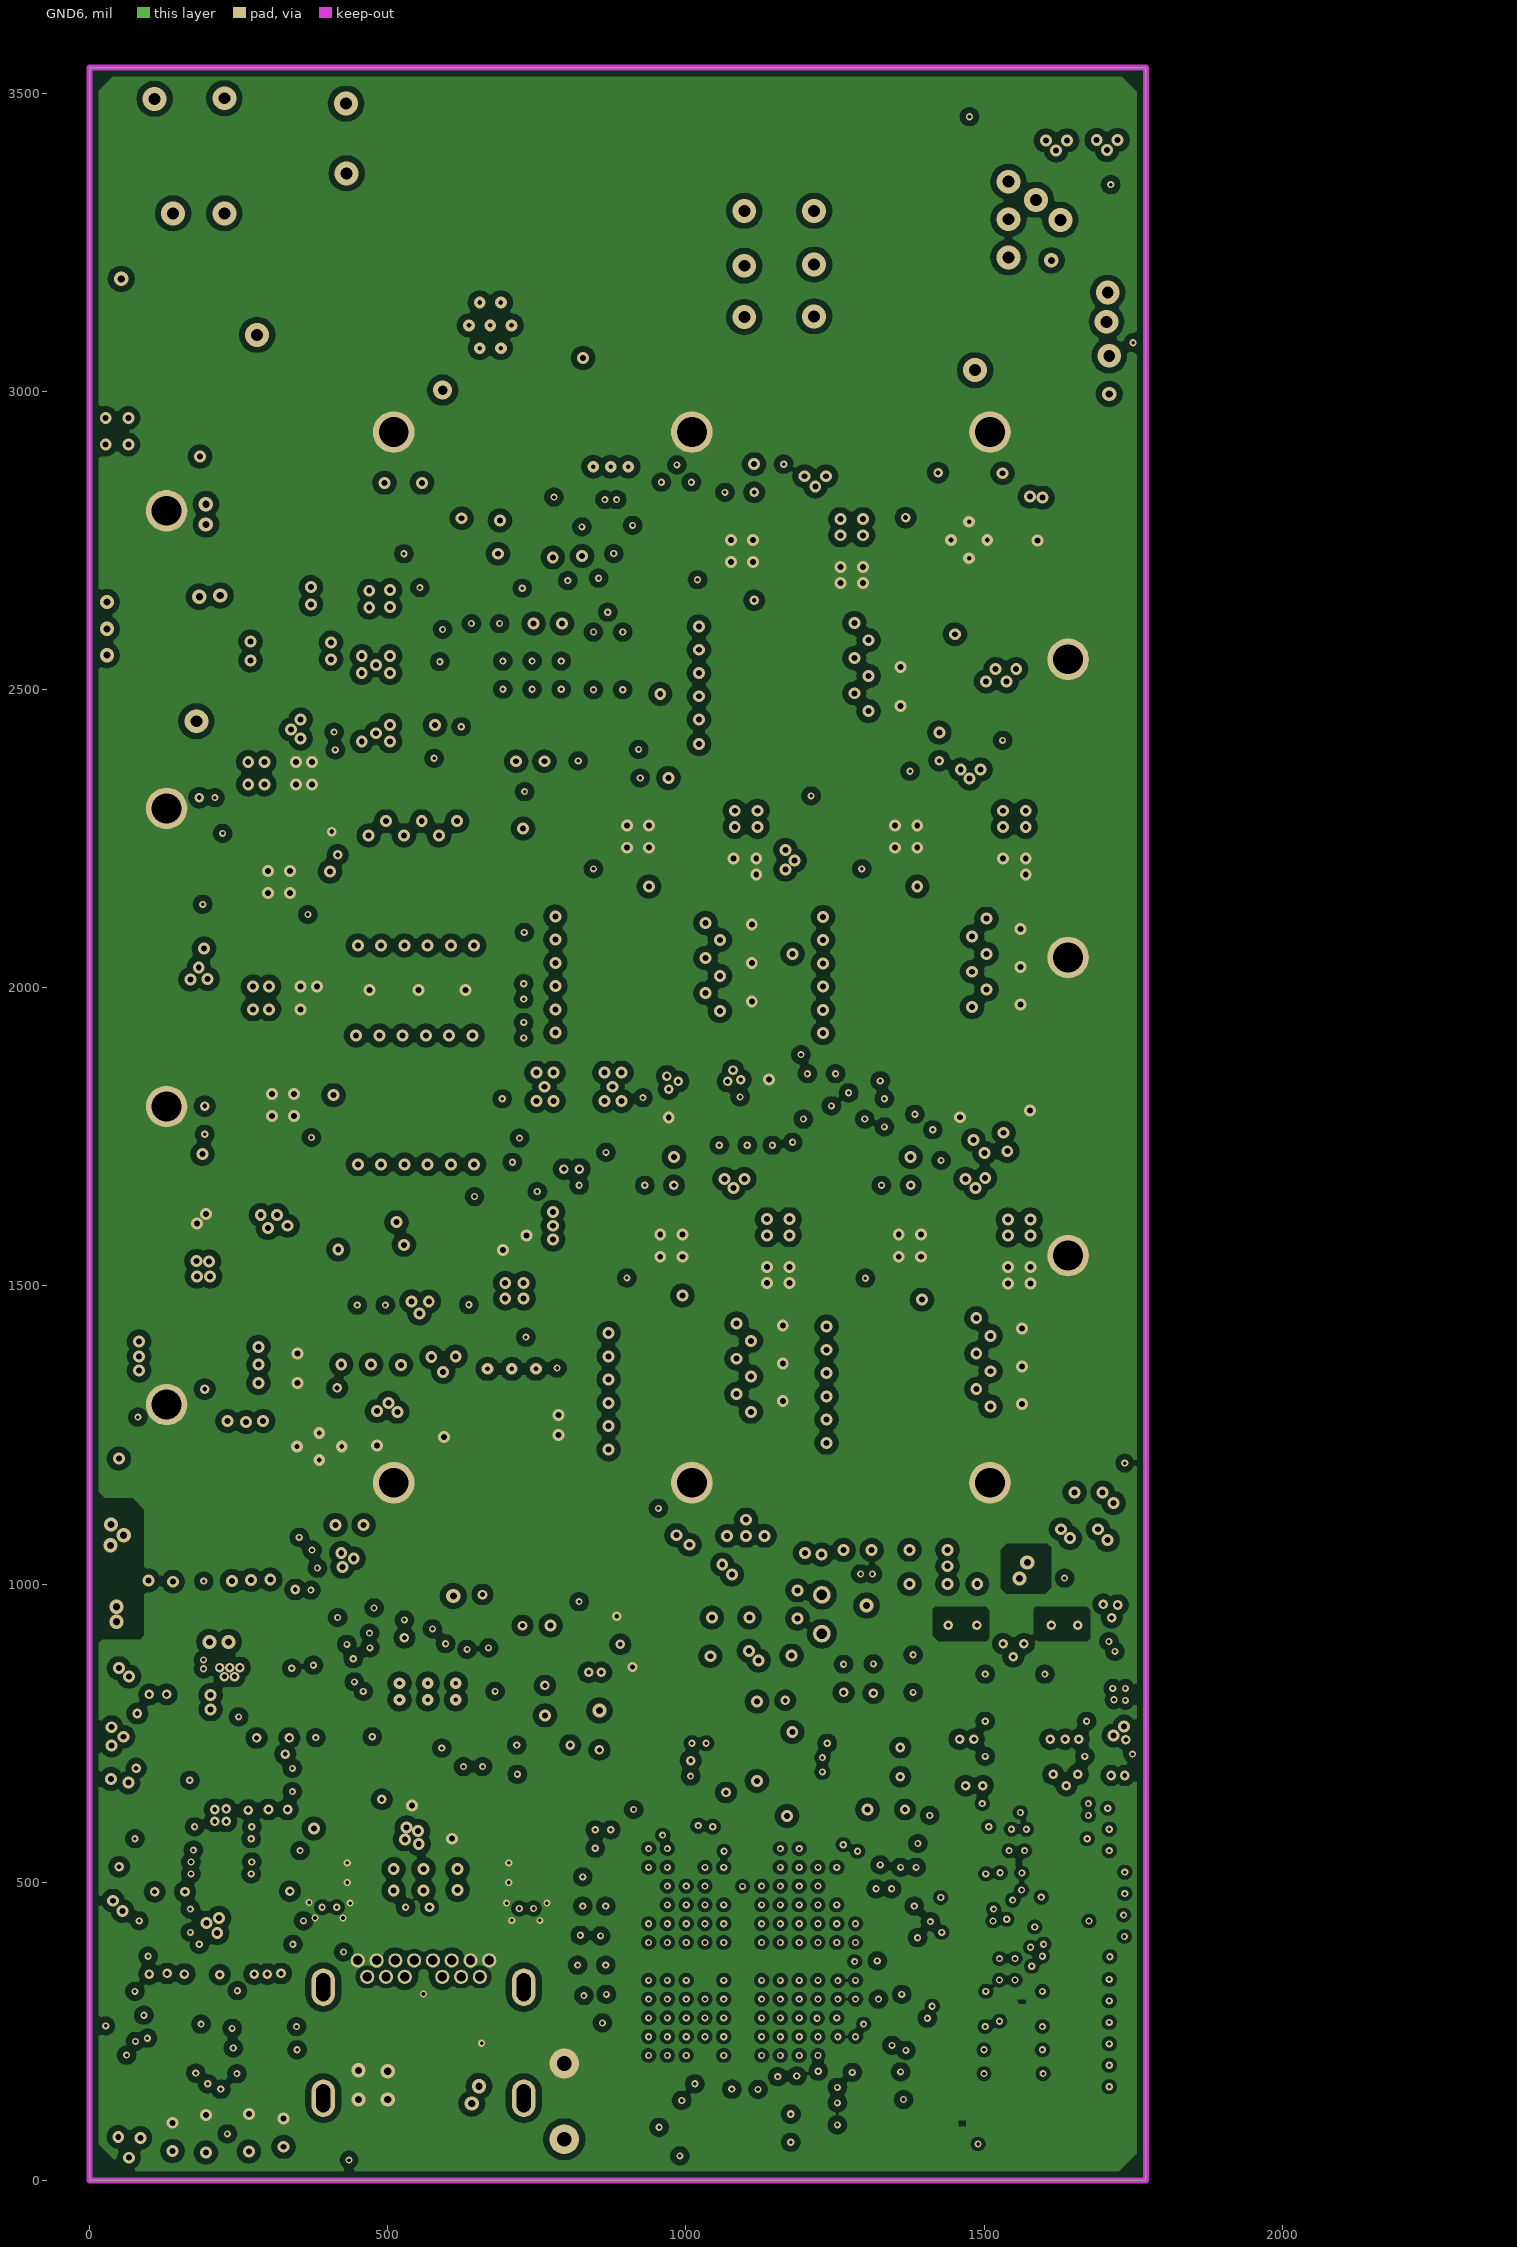
[diagram p9: GND6]
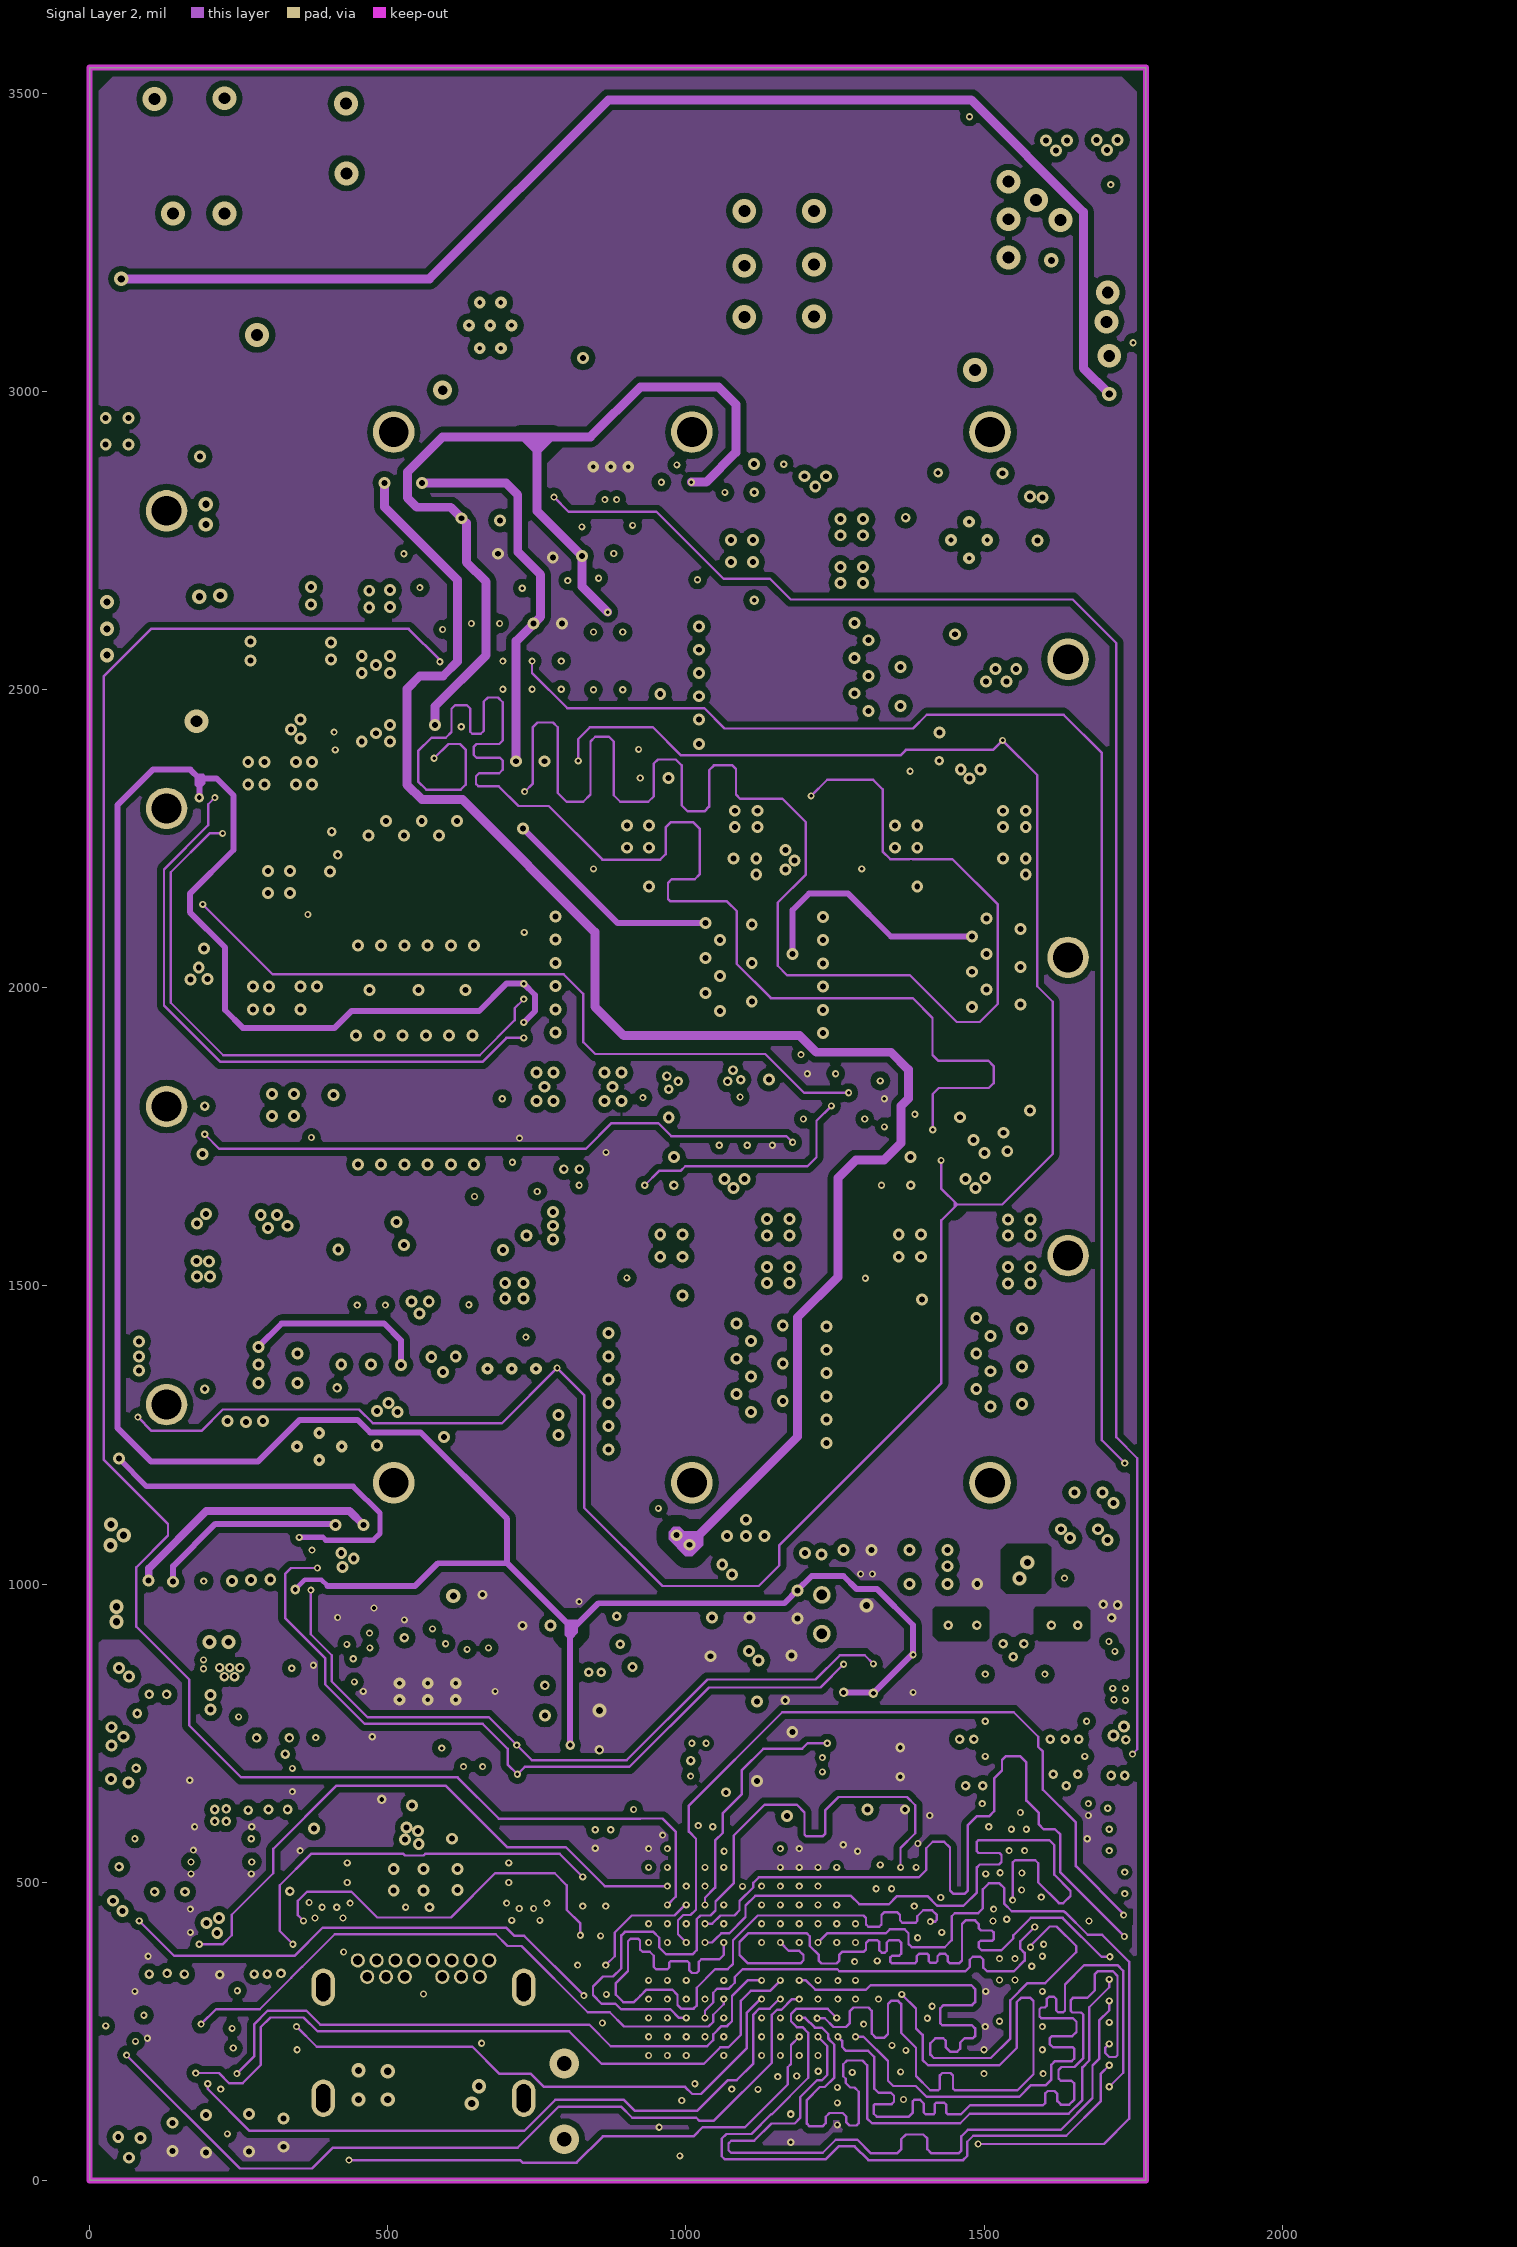
[diagram p10: Signal Layer 2]
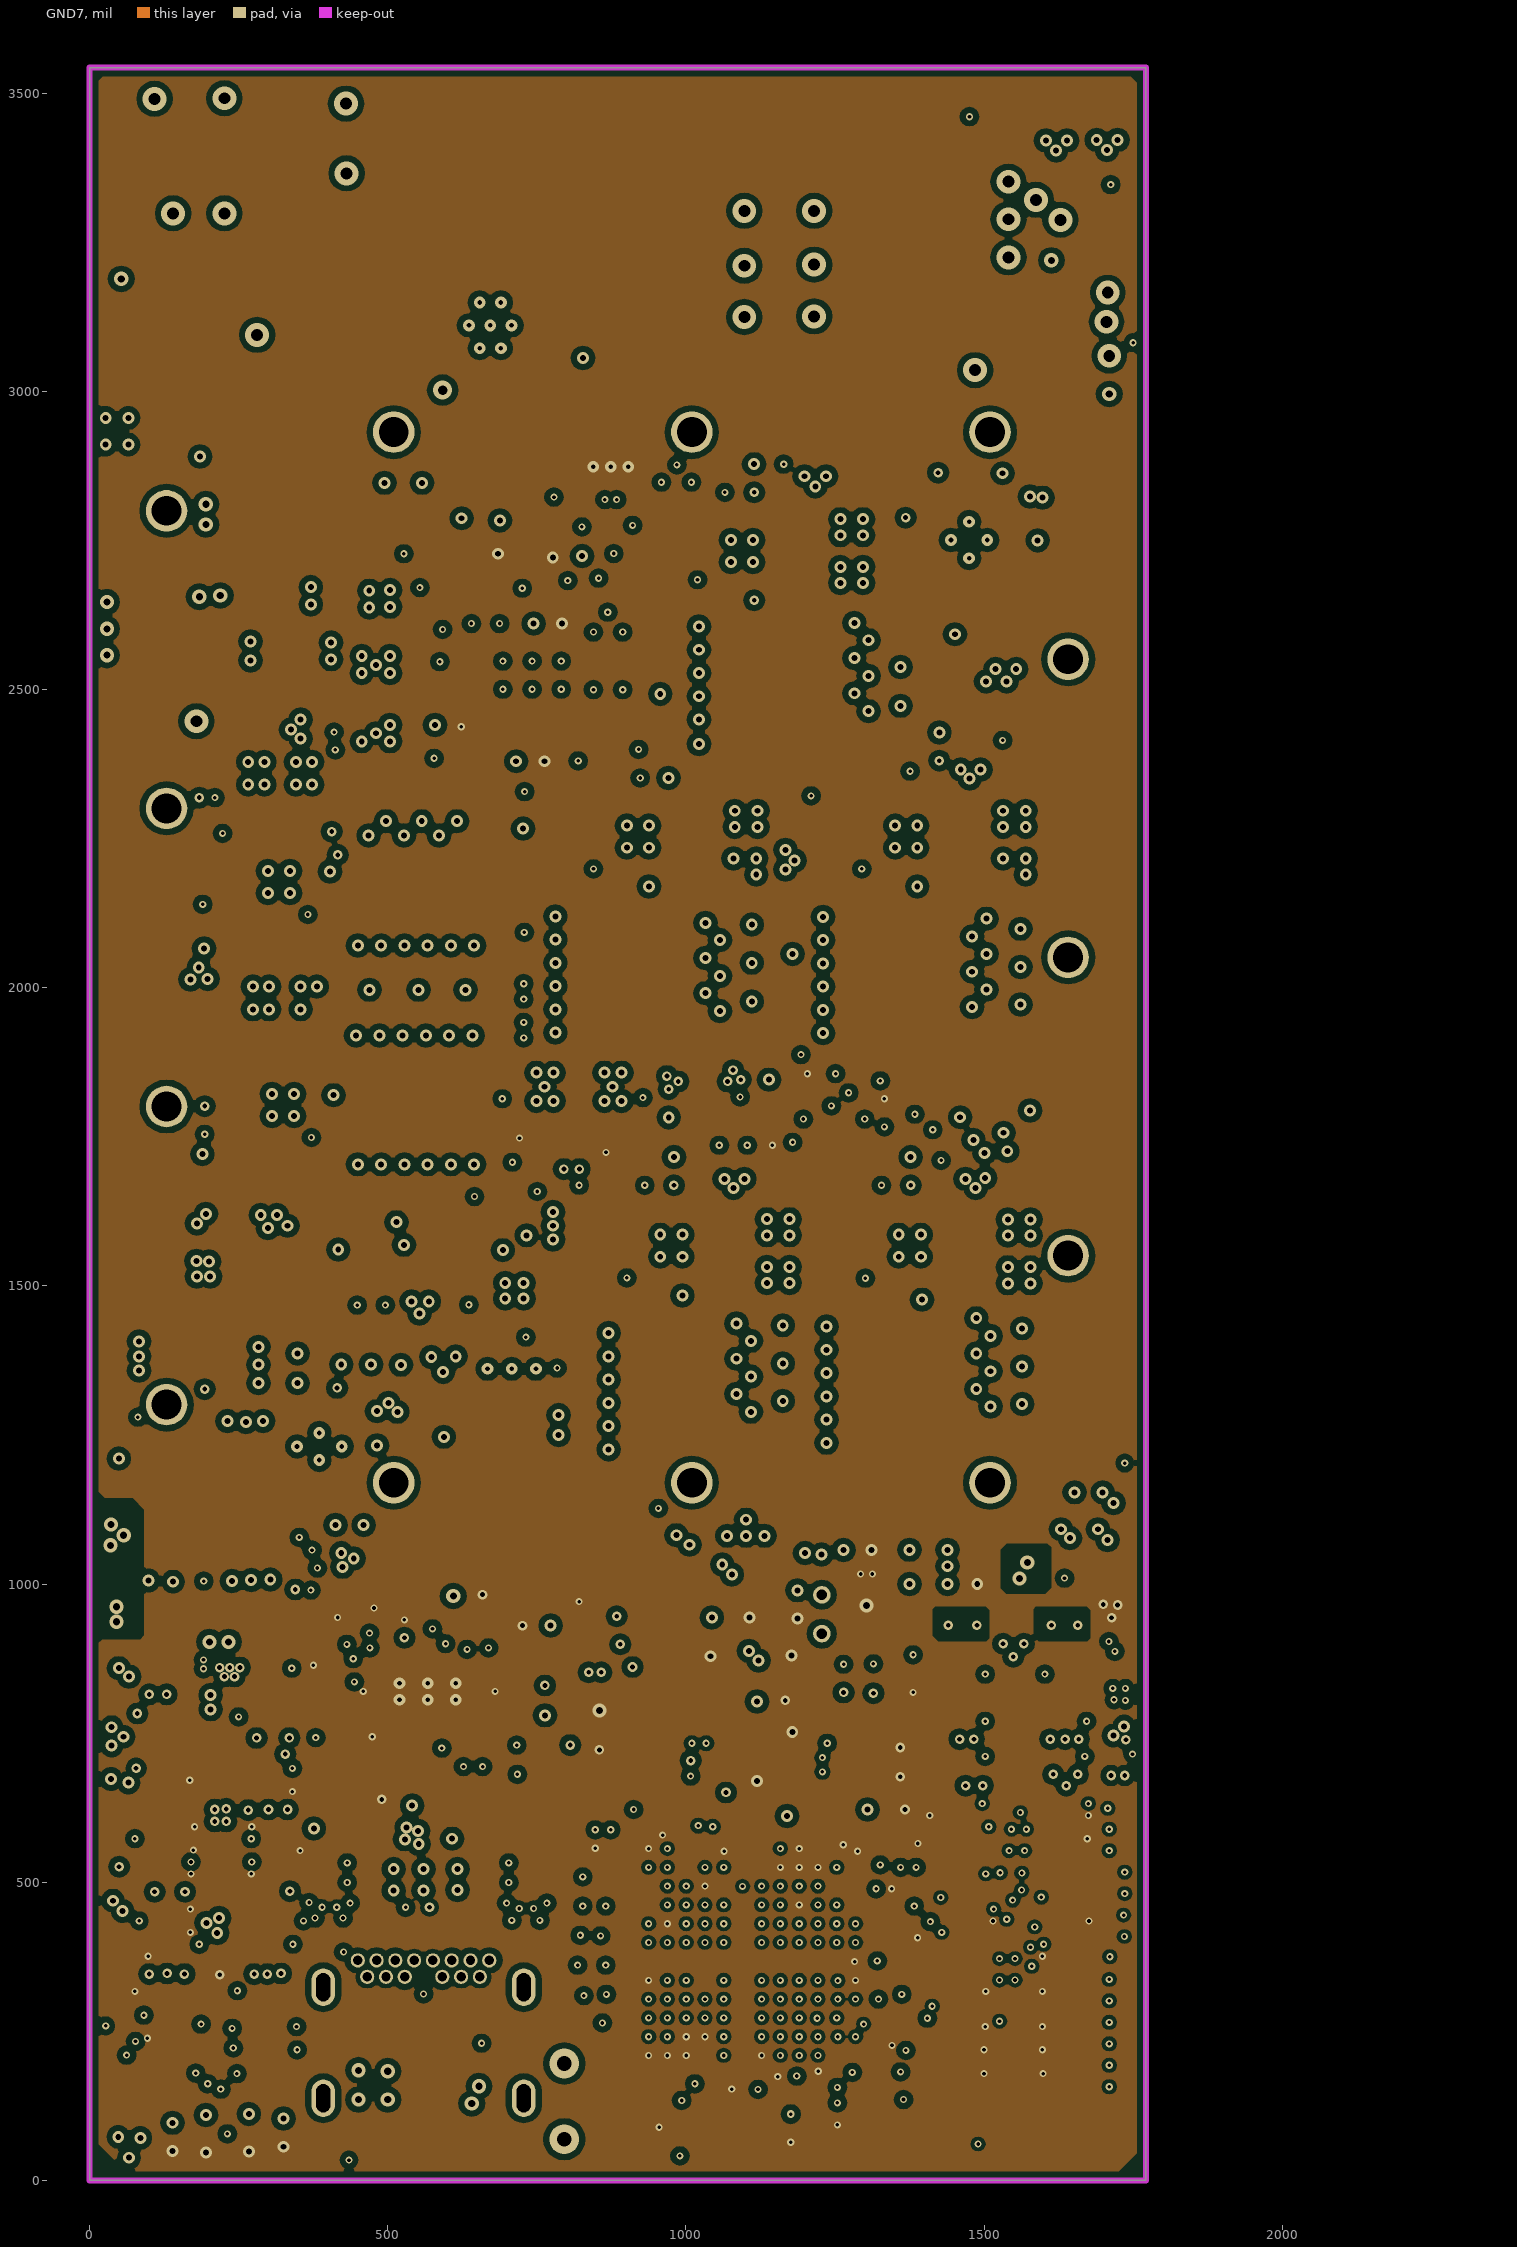
[diagram p11: GND7]

## Layer stack, top to bottom
Top Solder: solder mask 1, Solder Resist, Dk 3.5
Top Layer: signal copper 2.598
Dielectric1: core 4.164, FR-4 High_Tg, Dk 4.2
GND1: signal copper 0.709
Dielectric 2: dielectric 4.488, FR-4 High_Tg, Dk 4.2
Signal Layer 1: signal copper 0.709
Dielectric 3: dielectric 5.733, FR-4 High_Tg, Dk 4.2
GND2: signal copper 0.709
Dielectric 4: dielectric 4.488, FR-4 High_Tg, Dk 4.2
POWER1: signal copper 0.709
Dielectric 5: dielectric 4.13, FR-4 High_Tg, Dk 4.2
POWER2: signal copper 0.709
Dielectric 6: dielectric 4.488, FR-4 High_Tg, Dk 4.2
GND4: signal copper 0.709
Dielectric 7: dielectric 4.13, FR-4 High_Tg, Dk 4.2
POWER3: signal copper 0.709
Dielectric 8: dielectric 4.488, FR-4 High_Tg, Dk 4.2
GND6: signal copper 0.709
Dielectric 9: dielectric 5.733, FR-4 High_Tg, Dk 4.2
Signal Layer 2: signal copper 0.719
Dielectric 10: dielectric 4.488, FR-4 High_Tg, Dk 4.2
GND7: signal copper 0.709
Dielectric 12: dielectric 4.164, FR-4 High_Tg, Dk 4.2
Bottom Layer: signal copper 2.598
Bottom Solder: solder mask 1, Solder Resist, Dk 3.5

## Board outline
0,0 1771.65,0 1771.65,3543.31 0,3543.31

## Design rules (kind name [scope] priority, off if disabled: settings)
AcuteAngle [All] p1: minimum=4.50000000000000E+0001 checktracksonly=FALSE
AssemblyTestPointUsage [All] p1: valid=2
BoardOutlineClearance BoardOutlineClearance_MountingHoles [OnCopper and InComponentClass('Mounting Holes')] p1: gap=15 ignorepadtopadclearanceinfootprint=FALSE
BoardOutlineClearance BoardOutlineClearance_Poly [OnCopper and IsPoly] p2: gap=15 ignorepadtopadclearanceinfootprint=FALSE
BoardOutlineClearance [OnCopper and Not InComponentClass('Logo') and not InComponentClass('FiducialMark') and not InRegion(1000,500,4000,800) and not InPoly] p3: gap=10 ignorepadtopadclearanceinfootprint=FALSE
Clearance U13 [InComponent('U13')] p1: gap=5 ignorepadtopadclearanceinfootprint=TRUE except(0: Arc-Hole Track-Hole SMDPad-Hole THPad-Hole Via-Hole Fill-Hole Poly-Hole Region-Hole Text-Hole; 20: Poly-Poly)
Clearance "COMPONETS LDO" [InComponentClass('COMPONENTS 17/12/23')] p2: gap=4.7 ignorepadtopadclearanceinfootprint=TRUE except(0: Arc-Hole Track-Hole SMDPad-Hole THPad-Hole Via-Hole Fill-Hole Poly-Hole Region-Hole Text-Hole; 20: Poly-Poly)
Clearance diff [InNetClass('DIFF PAIR')] p3: gap=7.2 ignorepadtopadclearanceinfootprint=TRUE except(0: Arc-Hole Track-Hole SMDPad-Hole THPad-Hole Via-Hole Fill-Hole Poly-Hole Region-Hole Text-Hole; 6: Track-Track; 6.8: Track-THPad Track-Via; 20: Poly-Poly)
Clearance ROOM [WithinRoom('ROOM1')OR WithinRoom('DATA ROUTING ROOM2')] p4: gap=5.8 ignorepadtopadclearanceinfootprint=TRUE except(0: Arc-Hole Track-Hole SMDPad-Hole THPad-Hole Via-Hole Fill-Hole Poly-Hole Region-Hole Text-Hole; 6.3: Via-Fill Via-Poly Via-Region; 10: Arc-Fill Arc-Poly Arc-Region Track-Fill Track-Poly Track-Region; 20: Fill-Fill Fill-Poly Fill-Region Poly-Poly Poly-Region Region-Region)
Clearance "Component INA AND U12" [InComponent('U24')AND InComponent('U25')AND  InComponent('U26')] p5: gap=6.6 ignorepadtopadclearanceinfootprint=TRUE except(0: Arc-Hole Track-Hole SMDPad-Hole THPad-Hole Via-Hole Fill-Hole Poly-Hole Region-Hole Text-Hole; 6: Via-Region; 20: Poly-Poly)
Clearance Clearance_Keepouts [IsKeepOut] p6: gap=7 ignorepadtopadclearanceinfootprint=TRUE except(20: Fill-Fill Fill-Poly Fill-Region Poly-Poly Poly-Region Region-Region)
Clearance Clearance_Poly [InPolygon] p7: gap=10 ignorepadtopadclearanceinfootprint=TRUE except(0: Arc-Hole Track-Hole SMDPad-Hole THPad-Hole Via-Hole Fill-Hole Poly-Hole Region-Hole Text-Hole; 20: Fill-Fill Fill-Poly Fill-Region Poly-Poly Poly-Region Region-Region)
Clearance Clearance_FiducialMark [IsKeepOut and InComponentClass('FiducialMark')] p8: gap=0 ignorepadtopadclearanceinfootprint=TRUE
Clearance [All] p9: gap=7.2 ignorepadtopadclearanceinfootprint=TRUE except(0: Arc-Hole Track-Hole SMDPad-Hole THPad-Hole Via-Hole Fill-Hole Poly-Hole Region-Hole Text-Hole; 4.7: SMDPad-Region; 5.6: Region-Region; 6.12: Via-Region; 6.5: Track-SMDPad; 8: Track-Poly SMDPad-Poly Via-Poly; 20: Poly-Poly)
ComponentClearance ComponentClearance_MountingHoles_FiducialMarks [InComponentClass('Mounting Holes') vs InComponentClass('FiducialMark')] p1: gap=50 collisioncheckmode=3 verticalgap=10 showdistances=FALSE
ComponentClearance ComponentClearance_Shunt [InComponentClass('Header') vs InComponentClass('Shunt')] p2: gap=0 collisioncheckmode=3 verticalgap=0 showdistances=FALSE
ComponentClearance ComponentClearance_Logo [InComponentClass('Logo')] p3: gap=10 collisioncheckmode=3 verticalgap=10 showdistances=FALSE
ComponentClearance ComponentClearance_ScrewToNut [(HasFootprint('NY PMS 440 0025 PH')) vs (HasFootprint('Keystone_1902C'))] p4: gap=5 collisioncheckmode=3 verticalgap=10 showdistances=FALSE
ComponentClearance ComponentClearance_MountingHoles [InComponentClass('Mounting Holes')] p5: gap=250 collisioncheckmode=3 verticalgap=100000 showdistances=FALSE
ComponentClearance ComponentClearance_SmallPassives [HasFootprint('0201*') or HasFootprint('0402*') or HasFootprint('0508') or HasFootprint('0603*') or HasFootprint('0612') or HasFootprint('0805*') or HasFootprint('0815*') or HasFootprint('0830*') or HasFootprint('1206*') or HasFootprint('1210*') or HasFootprint('1808*') or HasFootprint('1812*') or HasFootprint('1825*') or HasFootprint('2010*') or HasFootprint('2220*') or HasFootprint('2225*') or HasFootprint('2512*') or HasFootprint('2728*') or HasFootprint('3518*') vs HasFootprint('0201*') or HasFootprint('0402*') or HasFootprint('0508') or HasFootprint('0603*') or HasFootprint('0612') or HasFootprint('0805*') or HasFootprint('0815*') or HasFootprint('0830*') or HasFootprint('1206*') or HasFootprint('1210*') or HasFootprint('1808*') or HasFootprint('1812*') or HasFootprint('1825*') or HasFootprint('2010*') or HasFootprint('2220*') or HasFootprint('2225*') or HasFootprint('2512*') or HasFootprint('2728*') or HasFootprint('3518*')] p6: gap=6 collisioncheckmode=3 verticalgap=10 showdistances=FALSE
ComponentClearance ComponentClearance_THtoSMT [IsThruComponent vs IsSMTComponent] p7: gap=15 collisioncheckmode=3 verticalgap=25 showdistances=FALSE
ComponentClearance ComponentClearance_THtoTH [IsThruComponent vs IsThruComponent] p8: gap=30 collisioncheckmode=3 verticalgap=30 showdistances=FALSE
ComponentClearance [All] p9: gap=10 collisioncheckmode=3 verticalgap=10 showdistances=FALSE
DiffPairsRouting 90E [InDifferentialPairClass('USB_C')] p1: maxlimit=8 minlimit=6 mostfreqgap=8 toplayer_maxgap=6 toplayer_prefgap=6 toplayer_minwidth=5 toplayer_maxwidth=5 toplayer_prefwidth=5 midlayer1_mingap=0 midlayer1_maxgap=0 midlayer1_prefgap=0 midlayer1_minwidth=0 midlayer1_maxwidth=0 midlayer1_prefwidth=0 midlayer2_mingap=8 midlayer2_minwidth=4 midlayer2_maxwidth=4 midlayer2_prefwidth=4 midlayer3_mingap=0 midlayer3_maxgap=0 midlayer3_prefgap=0 midlayer3_minwidth=0 midlayer3_maxwidth=0 midlayer3_prefwidth=0 midlayer4_mingap=0 midlayer4_maxgap=0 midlayer4_prefgap=0 midlayer4_minwidth=0 midlayer4_maxwidth=0 midlayer4_prefwidth=0 midlayer5_mingap=0 midlayer5_maxgap=0 midlayer5_prefgap=0 midlayer5_minwidth=0 midlayer5_maxwidth=0 midlayer5_prefwidth=0 midlayer6_mingap=0 midlayer6_maxgap=0 midlayer6_prefgap=0 midlayer6_minwidth=0 midlayer6_maxwidth=0 midlayer6_prefwidth=0 midlayer7_mingap=8 midlayer7_minwidth=4 midlayer7_maxwidth=4 midlayer7_prefwidth=4 midlayer8_mingap=0 midlayer8_maxgap=0 midlayer8_prefgap=0 midlayer8_minwidth=0 midlayer8_maxwidth=0 midlayer8_prefwidth=0 midlayer9_mingap=8 midlayer9_minwidth=4 midlayer9_maxwidth=4 midlayer9_prefwidth=4 midlayer11_mingap=0 midlayer11_maxgap=0 midlayer11_prefgap=0 midlayer11_minwidth=0 midlayer11_maxwidth=0 midlayer11_prefwidth=0 bottomlayer_maxgap=6 bottomlayer_prefgap=6 bottomlayer_minwidth=5 bottomlayer_maxwidth=5 bottomlayer_prefwidth=5 maxuncoupledlength=2.5
FabricationTestPointUsage TestPointUsage [All] p1: valid=2 allowmultiple=FALSE
FabricationTestpoint Testpoint [All] p1: side=3 testpointundercomponent=TRUE minsize=40 maxsize=100 preferedsize=60 minholesize=0 maxholesize=40 preferedholesize=32 testpointgrid=1 allowsidetop=TRUE allowsidebottom=TRUE usegrid=TRUE gridtolerance=0.01
FanoutControl Fanout_LCC [IsLCC] p1: bgadir=Out bgaviamode=Centered fanoutstyle=Auto fanoutdirection=Alternating viagrid=1 // Fanout_LCC (Default Rule)
FanoutControl Fanout_BGA [IsBGA] p2: bgadir=Out bgaviamode=Centered fanoutstyle=Auto fanoutdirection=Alternating viagrid=1 // Fanout_BGA (Default Rule)
FanoutControl Fanout_Default [All] p4: bgadir=Out bgaviamode=Centered fanoutstyle=Auto fanoutdirection=Alternating viagrid=1 // Fanout_Default (Default Rule)
FanoutControl Fanout_Small [(CompPinCount < 5)] p5: bgadir=Out bgaviamode=Centered fanoutstyle=Auto fanoutdirection=OutThenIn viagrid=1 // Fanout_Small (Default Rule)
HoleSize [All] p1: absolutevalues=TRUE maxlimit=251 minlimit=6 maxpercent=80.000 minpercent=20.000
HoleToHoleClearance [All] p1: gap=8 allowstackedmicrovias=TRUE
Length "CLOCK SIGNAL" [InxSignalClass('CLOCK SIGNAL')] p1: maxlimit=2765 minlimit=2665
Length "DATA SIGNAL" [InxSignalClass('DATA SIGNAL')] p2: maxlimit=1555 minlimit=1405
MatchedLengths USB [InDifferentialPairClass('USB_LENGTH')] p1: tolerance=1.5 checknetsindiffpair=TRUE checkdiffpairvsdiffpair=FALSE checkxsignals=FALSE checkothers=FALSE
MatchedLengths "TX2 SIGNAL" [InxSignalClass('TX2 SIGNAL')] p2: tolerance=1.5 checknetsindiffpair=FALSE checkdiffpairvsdiffpair=TRUE checkxsignals=TRUE checkothers=TRUE
MatchedLengths "TX1 SIGNAL" [InxSignalClass('TX1  SIGNAL')] p3: tolerance=1.5 checknetsindiffpair=FALSE checkdiffpairvsdiffpair=TRUE checkxsignals=TRUE checkothers=TRUE
MinimumAnnularRing MinimumAnnularRing_ThermalPadVias [IsVia and InAnyComponent] p1: minimumring=5.91
MinimumAnnularRing [All] p2: minimumring=8
MinimumSolderMaskSliver MinimumSolderMaskSliver_Logo [InComponentClass('Logo') vs InComponentClass('Logo')] p1: minsoldermaskwidth=0.7
MinimumSolderMaskSliver [All] p2: minsoldermaskwidth=3.94
PlaneConnect [All] p1: planeconnectstyle=Direct reliefexpansion=10 reliefentries=4 reliefconductorwidth=10 reliefairgap=10
PolygonConnect [All] p1: connectstyle=Direct reliefconductorwidth=10 reliefentries=4 polygonreliefangle="90 Angle" airgapwidth=10
RoomDefinition "DATA ROUTING ROOM2" [InComponentClass('Components Class 1')] p1: confinementstyle=ConfineIn formatcopy=TRUE lockcomponents=FALSE outline 1410.8,638.2 1758,638.2 1758,38 1410.8,38
RoomDefinition ROOM1 [InComponentClass('LVPS RX Supply 1V8')] p2: confinementstyle=ConfineOut formatcopy=TRUE lockcomponents=FALSE outline 914.15,579.85 1307.84,579.85 1307.84,186.16 914.15,186.16
RoutingVias ThermalPadVias [IsVia and InAnyComponent] p1: holewidth=6 width=19.68 viastyle="Through Hole" minholewidth=6 minwidth=12 maxholewidth=30 maxwidth=60
RoutingVias [All] p2: holewidth=8 width=16 viastyle="Through Hole" minholewidth=6 minwidth=12 maxholewidth=30 maxwidth=60
SilkToBoardRegionClearance [Not ((IsComment or IsDesignator) And (Hide <> 'False')) and not InRegion(1000,500,4000,800)] p1:
SilkToSilkClearance SilkToSilkClearance_Pb-FreeLogo [(HasFootprint('Pb-Free_Overlay_Medium') OR HasFootprint('Pb-Free_Overlay_Small')) vs (HasFootprint('Pb-Free_Overlay_Medium') OR HasFootprint('Pb-Free_Overlay_Small'))] p1: silktosilkclearance=0
SilkToSilkClearance [All] p2: silktosilkclearance=4
SilkToSolderMaskClearance SilkToComponentPadClearance [(IsPad or IsFill or IsRegion) and InAnycomponent] p1: minsilkscreentomaskgap=5 clearancetoexposedcopper=TRUE
SilkToSolderMaskClearance "Silk to Solder Mask Opening" [All] p2: minsilkscreentomaskgap=4 clearancetoexposedcopper=FALSE
SolderMaskExpansion [All] p1: expansion=1.97
Width POWER [InNetClass('POWER')] p1: maxlimit=40 minlimit=5 preferedwidth=15
Width Width_1 [All] p2: maxlimit=15 minlimit=4 preferedwidth=4 toplayer_minwidth=6.25 toplayer_maxwidth=6.25 toplayer_prefwidth=6.25 midlayer1_minwidth=0 midlayer1_maxwidth=0 midlayer1_prefwidth=0 midlayer2_maxwidth=4 midlayer3_minwidth=0 midlayer3_maxwidth=0 midlayer3_prefwidth=0 midlayer4_minwidth=0 midlayer4_maxwidth=0 midlayer4_prefwidth=0 midlayer5_minwidth=0 midlayer5_maxwidth=0 midlayer5_prefwidth=0 midlayer6_minwidth=0 midlayer6_maxwidth=0 midlayer6_prefwidth=0 midlayer7_maxwidth=4 midlayer8_minwidth=0 midlayer8_maxwidth=0 midlayer8_prefwidth=0 midlayer9_maxwidth=4 midlayer11_minwidth=0 midlayer11_prefwidth=15 bottomlayer_minwidth=6.25 bottomlayer_maxwidth=6.25 bottomlayer_prefwidth=6.25 minimp=50.000000 maximp=50.000000 favimp=50.000000
14 further rules are at their usual default settings.

## Classes and differential pairs
differential pair class USB_LENGTH: SSRX SSRX1 SSRX2 SSTX
component class "LVPS TX Supply 5V and m5V": C116 C117 C118 C119 C120 C121 C122 C134 C137 C171 C178 C179 C180 C181 C182 C183 C184 C185 C186 C187 C188 C189 C190 C191 C192 C193 C194 C195 C206 C207 C243 D7 D8 D17 L19 L28 L34 R67 R120 R134 R135 R136 R137 R138 R139 R140 R141 R142 R163 R164 R165 R181 R188 R190 R191 R195 R239 R241 R242 R246 R247 U8 U15 U16
component class "USB TYPE C Interface": 45 C115 C124 C125 C126 C127 C128 C129 C130 C131 C133 C153 C154 C202 C203 C209 C210 C217 C218 GND J3 L20 L21 L22 L38 L39 R90 R146 R147 R148 r153 R161 R162 R166 R168 R170 R171 R173 R174 R176 R177 R178 R179 R180 R182 R229 R230 R231 R236 R237 R238 U18 U19 U20 U21 U22 U23 U26 VBUS
component class "Input Output Connector": C77 C78 C164 C165 C166 C167 C168 C169 C170 C172 C173 C174 C204 C205 C211 C212 C234 C235 C236 C242 J1 J2 L32 L33 L36 L37 R25 R68 R70 R73 R75 R77 R78 R79 R80 R81 R82 R83 R84 R85 R86 R87 R88 R89 R95 R102 R154 R157 R158 R160 R167 R172 R175 R187 R234 SCL SDA U7 U17 U27 U28 U29 U31
component class "LVPS RX Supply 1V8": C69 C80 C81 C82 C83 C84 C85 C86 C87 C88 C89 C90 C91 C92 C93 C95 C99 C107 C151 C225 C226 D16 L13 L14 L15 L16 L26 R91 R92 R93 R94 R96 R97 R98 R99 R100 R101 R103 R111 U9 U10
component class "LVPS FPGA": C59 C60 C61 C62 C63 C64 C65 C66 C67 C68 C75 C76 C79 C136 C152 C157 C158 C159 C160 C162 C163 C227 C228 C229 C230 C231 D14 D15 L11 L27 L30 L31 R66 R69 R72 R74 R76 R119 R121 R124 R127 R128 R129 R131 R132 R133 R151 R152 R183 R184 R232 R233 U6 U25 U30
component class LVPS_FX3_Supply: C39 C40 C41 C43 C44 C45 C46 C47 C48 C49 C50 C51 C52 C53 C54 C55 C56 C57 C58 C73 C74 C94 C96 C97 C98 C100 C101 C123 C239 C240 D12 D13 L6 L7 L8 L9 L10 L12 L17 L18 L23 L35 R46 R47 R48 R49 R50 R51 R52 R53 R55 R56 R57 R58 R59 R60 R61 U4 U5
component class "High Voltage Power Supply": C22 C23 C24 C25 C26 C27 C28 C29 C30 C31 C32 C33 C34 C35 C36 C37 C38 C42 C70 C71 C72 C155 C156 C161 C177 C200 C201 C208 C214 C232 C233 C241 C244 D3 D4 D5 D6 D18 L1 L2 L3 L4 L5 L29 L42 L43 L44 Q1 Q2 Q3 R33 R34 R35 R36 R37 R38 R39 R40 R41 R42 R44 R45 R54 R71 R123 R126 R144 R145 R159 R185 R186 R200 R201 R235 R245 U3 U24
component class FX3_Interface: C1 C2 C3 C4 C5 C6 C7 C8 C9 C10 C11 C12 C13 C14 C15 C16 C17 C18 C19 C20 C21 C138 C139 C140 C141 C142 C143 C144 C145 C146 C147 C148 C149 C150 D1 D2 D9 R1 R2 R3 R4 R5 R6 R7 R8 R9 R10 R11 R12 R13 R14 R15 R16 R17 R18 R19 R20 R21 R22 R23 R24 R26 R27 R28 R29 R30 R31 R32 R43 R117 R122 R125 R130 R149 R150 R155 R156 R169 R189 R192 R193 R194 R196 R197 R198 R199 R216 R217 R218 R219 R220 R221 R222 R223 R224 R225 R226 R227 R228 R240 R243 R244 S1 S? U1 U2 Y1
component class AssemblyNote: ZZ1 ZZ2 ZZ3 ZZ4
component class EVM_Hardware: J4 Logo1 Logo2 Logo3 LOGO4 Logo5 LOGO6 Logo10 ZZ1 ZZ2 ZZ3 ZZ4
component class Logo: Logo5
component class "LVPS RX Supply 3V3 and 1V2_1": C102 C103 C104 C105 C106 C108 C109 C110 C111 C112 C113 C114 C132 C135 C175 C176 C196 C197 C198 C199 C213 C215 C216 C219 C220 C221 C222 C223 C224 C237 C238 D10 D11 L24 L25 L40 L41 R62 R63 R64 R65 R104 R105 R106 R107 R108 R109 R110 R112 R113 R114 R115 R116 R118 U11 U12 U13 U14
net class POWER: 1.8V_AVDD 1.8V_AVDD_VCA 1V2_DVDD 1V8_AVDD_IO_TX 1V8_DVDD 1V8_VDD_RX 3.3V 3.3V_AVDD ADDR AVSS GND_A7 GND_SIG "HV FB" HVGND HVM HVP I2C_1V8 INT# NetC22_1 NetC25_1 NetC25_2 NetC27_1 NetC27_2 NetC28_2 NetC30_1 NetC32_1 NetC33_1 NetC34_1 NetC41_1 NetC42_1 NetC46_1 NetC56_1 NetC61_1 NetC62_1 NetC72_1 NetC77_1 NetC81_1 NetC83_1 NetC96_1 NetC103_1 NetC110_1 NetC117_1 NetC119_1 NetC120_1 NetC132_1 NetC157_1 NetC164_1 NetC179_1 NetC182_2 NetC183_1 NetC186_1 NetC187_1 NetC188_2 NetC190_1 NetC190_2 NetC196_1 NetC206_1 NetC208_2 NetC217_1 NetC227_1 NetD1_1 NetD2_1 NetD4_1 NetD4_2 NetQ1_1 NetR3_2 NetR6_2 NetR25_1 NetR93_1 NetR103_1 NetR113_1 NetR135_1 NetR141_2 NetR163_1 NetR173_1 NetR184_1 PGND TX_5V TX_-5V VBUS VBUS_USB VCC_3.3V VCC_3.3V_CDCE VCC_AUX_1V8 VCC_FX3_AVDD VCC_FX3_CVDDQ VCC_FX3_DVDD VCC_FX3_RXVDDQ VCC_FX3_TXVDDQ VCC_FX3_VIO VCC_INT_1V VCCO_2V5 VDD VDD_FPGA VDD_OUT VFB_FPGA_1V VFB_FPGA_2V5 VFB_FX3_1V2 VFB_FX3_1V8 VFB_RX_1V2 VFB_RX_1V8 VFB_RX_3V3 VIN1+ VIN1- VIN2+ VIN2- VIN3+ VIN3- VTX_5V
differential pair class 90E: DP_DM SSRX SSRX1 SSRX2 SSTX SSTX1 SSTX1_SYS SSTX2 SSTX2_SYS
net class "DIFF PAIR": DM DP SSRX1_N SSRX1_P SSRX2_N SSRX2_P SSRXM SSRXP SSTX1_N SSTX1_N_SYS SSTX1_P SSTX1_P_SYS SSTX2_N SSTX2_N_SYS SSTX2_P SSTX2_P_SYS SSTXM SSTXP
component class "COMPONENTS 17/12/23": U12 U17 U23
differential pair SSRX1: +SSRX1_P -SSRX1_N
differential pair SSTX1: +SSTX1_P -SSTX1_N
differential pair SSRX2: +SSRX2_P -SSRX2_N
differential pair SSTX2: +SSTX2_P -SSTX2_N
differential pair SSTX1_SYS: +SSTX1_P_SYS -SSTX1_N_SYS
differential pair SSTX2_SYS: +SSTX2_P_SYS -SSTX2_N_SYS
differential pair SSTX: +SSTXP -SSTXM
differential pair SSRX: +SSRXP -SSRXM
differential pair DP_DM: +DP -DM

## Components (designator, comment, footprint, x,y, rotation, side; value= is the part's Value field where it differs from the comment)
C1 "GRM1555C1H100FA01D" 0402 1143,609 r180 top value=10pF
C2 "GRM1555C1H100FA01D" 0402 1143,805 r0 top value=10pF
C3 "GRM155R61E104KA87D" 0402 1175.94,87.54 r270 top value=0.1uF
C4 "GRM155R61E104KA87D" 0402 1365,407 r0 bottom value=0.1uF
C5 "GRM188R61C474KA93D" 0603 1381,850 r270 top value=0.47uF
C6 "C0603X6S1C104K030BC" 0201_033 1311.01,264 r0 bottom value=0.1uF
C7 "C0603X6S1C104K030BC" 0201_033 1256,538 r90 bottom value=0.1uF
C8 "C0603X6S1C104K030BC" 0201_033 1207,446 r135 bottom value=0.1uF
C9 "C0603X6S1C104K030BC" 0201_033 937,315 r90 bottom value=0.1uF
C10 "C0603X6S1C104K030BC" 0201_033 1014,493 r0 bottom value=0.1uF
C11 "C0603X6S1C104K030BC" 0201_033 1144,210 r180 bottom value=0.1uF
C12 "C0603X6S1C104K030BC" 0201_033 1284,383 r270 bottom value=0.1uF
C13 "C0603X6S1C104K030BC" 0201_033 1054.3,218.69 r135 bottom value=0.1uF
C14 "C0603X6S1C104K030BC" 0201_033 1332,489 r0 bottom value=0.1uF
C15 "C0603X6S1C104K030BC" 0201_033 924,538 r90 bottom value=0.1uF
C16 "C0603X6S1C104K030BC" 0201_033 986,429 r180 bottom value=0.1uF
C17 "C0603X6S1C104K030BC" 0201_033 1285,317.01 r90 bottom value=0.1uF
C18 "C0603X6S1C104K030BC" 0201_033 1222,197 r270 bottom value=0.1uF
C19 "C0603X6S1C104K030BC" 0201_033 1383,475 r90 bottom value=0.1uF
C20 "C1608X5R0J226M080AC" 0603 1107,645 r180 bottom value=22uF
C21 "C1608X5R0J226M080AC" 0603 935,627 r180 bottom value=22uF
C22 "GRM21BR61A476ME15" 0805M 1039,3356 r270 bottom value=47uF
C23 "GRM21BR61A476ME15" 0805M 1150,3357 r270 bottom value=47uF
C24 "08053C104KAT2A" 0805M 1261,3357 r270 bottom value=0.1uF
C25 "CGA4J3X7R1H225K125AB" 0805_HV 580,3164 r270 bottom value=2.2uF
C26 "GRM188C81E475KE11D" 0603 1324,3226 r0 bottom value=4.7uF
C27 "GRM155R61E104KA87D" 0402 1681,3215 r0 bottom value=0.1uF
C28 "GRM1885C1H271JA01D" 0603 1681,3347 r180 bottom value=270pF
C29 "GRM188R72A104KA35J" 0603 1635,985.5 r90 bottom value=0.1uF
C30 "C3216X7S2A225K160AB" 1206_180 354,3423.93 r90 bottom value=2.2uF
C31 "C3216X7S2A225K160AB" 1206_180 272,3424 r90 bottom value=2.2uF
C32 "GRM155R61C222KA01D" 0402 1587,3243.62 r90 bottom value=2200pF
C33 "885012005061" 0402 1627.5,3117 r0 bottom value=100pF
C34 "GRM1885C2A101JA01D" 0603 592,2971 r90 bottom value=100pF
C35 "CGA4J3X7R1H225K125AB" 0805_HV 421,3116 r0 bottom value=2.2uF
C36 "C3216X7S2A225K160AB" 1206_180 437,2652 r180 top value=2.2uF
C37 "C3216X7S2A225K160AB" 1206_180 437,2652 r180 bottom value=2.2uF
C38 "GRM188R72A104KA35J" 0603 77.5,950 r180 bottom value=0.1uF
C39 "885012206095" 0603 1258,1594 r270 bottom value=0.1uF
C40 "GRM155R61E104KA87D" 0402 1465,1000 r180 bottom value=0.1uF
C41 "GRM219R60J476ME44D" 0805_HV 1558,1557.5 r270 bottom value=47uF
C42 "GRM1885C1H271JA01D" 0603 1463.5,3290 r0 bottom value=270pF
C43 "GRM219R60J476ME44D" 0805_HV 1558,1557.5 r270 top value=47uF
C44 "885012206095" 0603 1483,1560.5 r270 bottom value=0.1uF
C45 "GRM155R71H272KA01D" 0402 1301,1536.62 r90 top value=2700pF
C46 "GRM188R60J476ME15D" 0603 1532.5,1429 r0 bottom value=47uF
C47 "GRM188R60J476ME15D" 0603 1532.5,1365 r0 bottom value=47uF
C48 "885012206095" 0603 1532.5,1302 r0 bottom value=0.1uF
C49 "GRM155R6YA225ME11D" 0402_070 1636,1052 r270 top value=2.2uF
C50 "GRM155R71H272KA01D" 0402 1393,1360 r270 bottom value=2700pF
C51 "GRM1555C1E681JA01D" 0402 1443,1359 r270 bottom value=680pF
C52 "GRM155R61E104KA87D" 0402 1700,1056 r90 top value=0.1uF
C53 "GRM155R61E104KA87D" 0402 1378,972.38 r90 bottom value=0.1uF
C54 "885012206095" 0603 858,1594 r270 bottom value=0.1uF
C55 "GRM155R61E104KA87D" 0402 1288,1057 r180 bottom value=0.1uF
C56 "GRM219R60J476ME44D" 0805_HV 1154,1558 r270 bottom value=47uF
C57 "GRM219R60J476ME44D" 0805_HV 1154,1558 r270 top value=47uF
C58 "885012206095" 0603 1080,1560.5 r270 bottom value=0.1uF
C59 "885012206095" 0603 296,2073 r0 bottom value=0.1uF
C60 "0402YC101KAT2A" 0402 729,2116.62 r90 bottom value=100pF
C61 "885012206095" 0603 619,2301.5 r90 bottom value=0.1uF
C62 "GRM219R60J476ME44D" 0805_HV 320,2359 r0 top value=47uF
C63 "GRM219R60J476ME44D" 0805_HV 320,2359 r0 bottom value=47uF
C64 "885012206095" 0603 318,2283 r0 bottom value=0.1uF
C65 "0402YC101KAT2A" 0402 657,1790 r270 bottom value=100pF
C66 "GRM155R71H272KA01D" 0402 333.62,2123 r180 top value=2700pF
C67 "GRM188R60J476ME15D" 0603 471,2301.5 r90 bottom value=47uF
C68 "GRM188R60J476ME15D" 0603 545,2301.5 r90 bottom value=47uF
C69 "0402YC101KAT2A" 0402 1162,2378 r180 bottom value=100pF
C70 "C3216X7S2A225K160AB" 1206_180 109,3424 r90 bottom value=2.2uF
C71 "C3216X7S2A225K160AB" 1206_180 333,2532 r180 top value=2.2uF
C72 "C2012X7S2A105K125AB" 0805_HV 295,2769 r90 top value=1uF
C73 "CL05A106MP5NUNC" 0402 320,263 r270 bottom value=10uF
C74 "GRM155R61E104KA87D" 0402 271,263 r90 bottom value=0.1uF
C75 "GRM155R71H272KA01D" 0402 610,2176.87 r270 bottom value=2700pF
C76 "GRM1555C1E681JA01D" 0402 560.62,2176.38 r270 bottom value=680pF
C77 "C1005X6S1C105K050BC" 0402 766,2931.62 r270 bottom value=1uF
C78 "GRM033R71C102KA01D" 0201 972,2877 r0 bottom value=1000pF
C79 "885012206095" 0603 293,1700 r0 bottom value=0.1uF
C80 "885012206095" 0603 976.5,2759 r270 bottom value=0.1uF
C81 "GRM219R60J476ME44D" 0805_HV 1275.5,2732 r270 bottom value=47uF
C82 "GRM219R60J476ME44D" 0805_HV 1275.5,2732 r270 top value=47uF
C83 "885012206052" 0603 1590,2782 r270 bottom value=1uF
C84 "885012206052" 0603 1590,2782 r270 top value=1uF
C85 "GRM188R61A475MAAJ" 0603 1544,2588 r0 top value=4.7uF
C86 "885012206095" 0603 1198.5,2732 r270 bottom value=0.1uF
C87 "GRM155R71H272KA01D" 0402 1019.5,2708 r90 top value=2700pF
C88 "GRM188R60J476ME15D" 0603 1328.5,2602 r0 bottom value=47uF
C89 "GRM188R60J476ME15D" 0603 1328.5,2538 r0 bottom value=47uF
C90 "885012206095" 0603 1328.5,2473 r0 bottom value=0.1uF
C91 "GRM155R61E104KA87D" 0402 78,526 r180 bottom value=0.1uF
C92 "GRM155R61E104KA87D" 0402 1558,681 r0 bottom value=0.1uF
C93 "GRM155R61E104KA87D" 0402 1475,824.62 r270 bottom value=0.1uF
C94 "GRM155R71H272KA01D" 0402 901,1537.12 r90 top value=2700pF
C95 "GRM155R61E104KA87D" 0402 1544,2644 r180 top value=0.1uF
C96 "GRM188R60J476ME15D" 0603 1131,1306 r0 bottom value=47uF
C97 "GRM188R60J476ME15D" 0603 1131,1370 r0 bottom value=47uF
C98 "885012206095" 0603 1131,1435 r0 bottom value=0.1uF
C99 "885012206052" 0603 1391.5,2864 r180 top value=1uF
C100 "GRM155R71H122KA01D" 0402 990,1363 r270 bottom value=1200pF
C101 "CL05A106MP5NUNC" 0402 1042,1363 r270 bottom value=10uF
C102 "885012206095" 0603 1252,2281 r270 bottom value=0.1uF
C103 "GRM219R60J476ME44D" 0805_HV 1550,2243 r270 top value=47uF
C104 "GRM219R60J476ME44D" 0805_HV 1550,2243 r270 bottom value=47uF
C105 "885012206095" 0603 1474,2247 r270 bottom value=0.1uF
C106 "GRM155R71H272KA01D" 0402 1295,2223.12 r90 top value=2700pF
C107 "GRM1555C1E471JA01D" 0402 1368.5,2719 r90 top value=470pF
C108 "GRM188R61A475MAAJ" 0603 1555,1772 r45 top value=4.7uF
C109 "885012206052" 0603 1555,1772 r45 bottom value=1uF
C110 "GRM188R60J476ME15D" 0603 1529.5,1970 r0 bottom value=47uF
C111 "GRM188R60J476ME15D" 0603 1529.5,2035 r0 bottom value=47uF
C112 "GRM155R61E104KA87D" 0402 131,412 r270 bottom value=0.1uF
C113 "885012206095" 0603 1529.5,2100 r0 bottom value=0.1uF
C114 "GRM155R71H272KA01D" 0402 1392,2052 r270 bottom value=2700pF
C115 "CL05A105KA5NQNC" 0402 749.62,930.5 r180 bottom value=1uF
C116 "GRM155R61E104KA87D" 0402 275.81,1601.53 r180 bottom value=0.1uF
C117 "GRM21BR61A476ME15" 0805_HV 180,1569 r90 bottom value=47uF
C118 "GRM21BR61A476ME15" 0805_HV 92,1569 r90 bottom value=47uF
C119 "GRM188R61A475MAAJ" 0603 226,1369 r270 bottom value=4.7uF
C120 "GRM188R61C106MAALD" 0603 321,1401 r0 bottom value=10uF
C121 "GRM188R61C106MAALD" 0603 209,1142 r180 bottom value=10uF
C122 "GRM155R61E104KA87D" 0402 291,1250 r270 bottom value=0.1uF
C123 "GRM155R61E104KA87D" 0402 1187,966 r90 bottom value=0.1uF
C124 "GRM155R61E104KA87D" 0402 539,608 r270 bottom value=0.1uF
C125 "C0603X6S1C104K030BC" 0201_033 479,589.99 r90 top value=0.1uF
C126 "C0603X6S1C104K030BC" 0201_033 750,589.99 r270 top value=0.1uF
C127 "C0603X6S1C104K030BC" 0201_033 443,589.99 r90 top value=0.1uF
C128 "C0603X6S1C104K030BC" 0201_033 714,589.99 r270 top value=0.1uF
C129 "GRM155R61E104KA87D" 0402 506,214 r270 bottom value=0.1uF
C130 "GRM155R61E104KA87D" 0402 762.27,853 r270 bottom value=0.1uF
C131 "885012206052" 0603 879,861 r0 bottom value=1uF
C132 "GRM155R61A106ME11" 0402 971.26,1806.38 r270 top value=10uF
C133 "GRM155R61E104KA87D" 0402 826,1009 r315 bottom value=0.1uF
C134 "GRM188R60J476ME15D" 0603 322,1338 r0 bottom value=47uF
C135 "160R07X104KV4T" 0402_065 971.26,1806.38 r270 bottom value=0.1uF
C136 "C0603X6S1C104K030BC" 0201_033 808.43,1696.06 r180 top value=0.1uF
C137 "GRM188R60J476ME15D" 0603 319,1389 r0 top value=47uF
C138 "GRM033R60J103KA01D" 0201 1332.62,226.48 r0 bottom value=0.01uF
C139 "GRM033R60J103KA01D" 0201 1292,538 r270 bottom value=0.01uF
C140 "C0603X6S1C104K030BC" 0201_033 961,566 r90 bottom value=0.1uF
C141 "C0603X6S1C104K030BC" 0201_033 1059,541 r90 bottom value=0.1uF
C142 "C0603X6S1C104K030BC" 0201_033 1180,559 r0 bottom value=0.1uF
C143 "C0603X6S1C104K030BC" 0201_033 1089,441 r270 bottom value=0.1uF
C144 "GRM033R60J103KA01D" 0201 1095,505 r90 bottom value=0.01uF
C145 "C1608X5R0J226M080AC" 0603 1336,622 r0 bottom value=22uF
C146 "GRM033R60J103KA01D" 0201 924,401 r180 bottom value=0.01uF
C147 "GRM033R60J103KA01D" 0201 1323,314 r90 bottom value=0.01uF
C148 "GRM033R60J103KA01D" 0201 1169,174 r180 bottom value=0.01uF
C149 "GRM033R60J103KA01D" 0201 888,538 r90 bottom value=0.01uF
C150 "GRM033R60J103KA01D" 0201 924,365 r180 bottom value=0.01uF
C151 "GRM155R61E104KA87D" 0402 138.38,783 r0 bottom value=0.1uF
C152 "C0603X6S1C104K030BC" 0201_033 878.99,1724 r180 bottom value=0.1uF
C153 "C0603X6S1C104K030BC" 0201_033 407,869 r90 bottom value=0.1uF
C154 "C0603X6S1C104K030BC" 0201_033 390,877.99 r270 top value=0.1uF
C155 "C0603X6S1C104K030BC" 0201_033 210.99,2183 r180 top value=0.1uF
C156 "C0603X6S1C104K030BC" 0201_033 429,2486 r90 bottom value=0.1uF
C157 "GRM219R60J476ME44D" 0805_HV 328,1982 r0 top value=47uF
C158 "GRM219R60J476ME44D" 0805_HV 328,1982 r0 bottom value=47uF
C159 "885012206095" 0603 325,1907 r0 bottom value=0.1uF
C160 "GRM155R71H272KA01D" 0402 348.38,1749 r180 top value=2700pF
C161 "GRM155R61E104KA87D" 0402 464.06,2831.77 r270 top value=0.1uF
C162 "GRM155R61E104KA87D" 0402 245,668 r0 bottom value=0.1uF
C163 "GRM155R61E104KA87D" 0402 306.6,553.38 r270 bottom value=0.1uF
C164 "C1005X6S1C105K050BC" 0402 688,2760.38 r270 bottom value=1uF
C165 "GRM155R61E104KA87D" 0402 624,2763.96 r270 bottom value=0.1uF
C166 "GRM155R61E104KA87D" 0402 739,2380 r0 top value=0.1uF
C167 "GRM155R61E104KA87D" 0402 661.38,2728 r0 top value=0.1uF
C168 "GRM155R61E104KA87D" 0402 768.38,2611 r0 bottom value=0.1uF
C169 "GRM155R61E104KA87D" 0402 802.38,2724 r180 top value=0.1uF
C170 "GRM155R61E104KA87D" 0402 602.88,2440.97 r0 bottom value=0.1uF
C171 "GRM188R60J476ME15D" 0603 319,1327 r0 top value=47uF
C172 "GRM155R61E104KA87D" 0402 558,2760.31 r270 bottom value=0.1uF
C173 "GRM155R61E104KA87D" 0402 802,2773 r180 top value=0.1uF
C174 "C1005X6S1C105K050BC" 0402 495.01,2760.31 r270 bottom value=1uF
C175 "GRM1555C1E681JA01D" 0402 1441,2052 r270 bottom value=680pF
C176 "885012206095" 0603 802,2281 r270 bottom value=0.1uF
C177 "GRM155R61E104KA87D" 0402 1629.5,3166 r0 bottom value=0.1uF
C178 "GRM188R61C106MAALD" 0603 235,1238 r270 bottom value=10uF
C179 "885012205031" 0402 328,1127 r180 bottom value=0.01uF
C180 "GRM155R61E104KA87D" 0402 215,1005 r0 bottom value=0.1uF
C181 "GRM188R61C106MAALD" 0603 482,1263.87 r270 top value=10uF
C182 "885012005061" 0402 472,1392 r90 bottom value=100pF
C183 "GRM1555C1H100FA01D" 0402 502,1545.38 r90 top value=10pF
C184 "0402YD333KAT2A" 0402 553,1545.38 r90 top value=0.033uF
C185 "GRM155R61E104KA87D" 0402 465.38,987 r0 bottom value=0.1uF
C186 "885012005061" 0402 763,1250 r0 bottom value=100pF
C187 "885012207026" 0805_HV 713,1532 r90 top value=10uF
C188 "885012206095" 0603 692,1390 r270 top value=0.1uF
C189 "GRM155R61E104KA87D" 0402 482,1271 r270 bottom value=0.1uF
C190 "885012205031" 0402 436,1099 r0 bottom value=0.01uF
C191 "GRM188R61C106MAALD" 0603 208,1078 r180 bottom value=10uF
C192 "885012205031" 0402 415,1305.38 r90 top value=0.01uF
C193 "885012207026" 0805_HV 713,1532 r90 bottom value=10uF
C194 "C2012X5R1A336M125AC" 0805_HV 594,1330 r90 bottom value=33uF
C195 "GRM188R61C106MAALD" 0603 638,1147 r270 bottom value=10uF
C196 "GRM219R60J476ME44D" 0805_HV 1098,2243 r270 top value=47uF
C197 "GRM219R60J476ME44D" 0805_HV 1098,2243 r270 bottom value=47uF
C198 "GRM155R61A106ME11" 0402 1115.63,1846 r0 top value=10uF
C199 "160R07X104KV4T" 0402_065 1115.63,1846 r0 bottom value=0.1uF
C200 "C3216X7S2A225K160AB" 1206_180 140,3231.93 r90 bottom value=2.2uF
C201 "C3216X7S2A225K160AB" 1206_180 226,3232 r90 bottom value=2.2uF
C202 "GRM155R61E104KA87D" 0402 932.7,991.3 r135 bottom value=0.1uF
C203 "GRM188R61A475MAAJ" 0603 972,1031.56 r315 bottom value=4.7uF
C204 "GRM155R61E104KA87D" 0402 1333,1790.38 r90 bottom value=0.1uF
C205 "GRM155R61E104KA87D" 0402 1227.38,1856 r180 bottom value=0.1uF
C206 "885012206048" 0603 709,1676 r90 bottom value=0.22uF
C207 "GRM188R61C106MAALD" 0603 574,1148.5 r90 bottom value=10uF
C208 "C3216X7S2A225K160AB" 1206_180 93,2514 r90 bottom value=2.2uF
C209 "GRM155R61E104KA87D" 0402 139,73 r90 bottom value=0.1uF
C210 "GRM155R61E104KA87D" 0402 325,80 r90 bottom value=0.1uF
C211 "GRM155R61E104KA87D" 0402 1714,920 r90 top value=0.1uF
C212 "GRM155R61E104KA87D" 0402 97,602 r0 bottom value=0.1uF
C213 "GRM155R61E104KA87D" 0402 1702,815 r0 bottom value=0.1uF
C214 "C3216X7S2A225K160AB" 1206_180 179,2514 r90 bottom value=2.2uF
C215 "885012206095" 0603 1023,2247 r270 bottom value=0.1uF
C216 "GRM155R71H272KA01D" 0402 845,2223.12 r90 top value=2700pF
C217 "GRM188R60J476ME15D" 0603 609,541 r90 bottom value=47uF
C218 "GRM188R60J476ME15D" 0603 608,541.5 r90 top value=47uF
C219 "GRM188R60J476ME15D" 0603 1079,2106 r0 bottom value=47uF
C220 "GRM188R60J476ME15D" 0603 1079,2042 r0 bottom value=47uF
C221 "885012206095" 0603 1079,1977 r0 bottom value=0.1uF
C222 "GRM155R71H182KA01D" 0402 936.62,2045.38 r270 bottom value=1800pF
C223 "CL05A106MP5NUNC" 0402 986.62,2045.38 r270 bottom value=10uF
C224 "885012206052" 0603 1531.5,1908 r0 top value=1uF
C225 "GRM155R71H272KA01D" 0402 1189,2530 r270 bottom value=2700pF
C226 "GRM1555C1E681JA01D" 0402 1239,2530 r270 bottom value=680pF
C227 "GRM188R60J476ME15D" 0603 469.53,1965.17 r90 bottom value=47uF
C228 "GRM188R60J476ME15D" 0603 630.53,1965.17 r90 bottom value=47uF
C229 "885012206095" 0603 551.42,1965.17 r90 bottom value=0.1uF
C230 "GRM155R71H272KA01D" 0402 529.62,1824.47 r0 bottom value=2700pF
C231 "GRM1555C1E681JA01D" 0402 529,1875.47 r0 bottom value=680pF
C232 "C3216X7S2A225K160AB" 1206_180 191,3424 r90 bottom value=2.2uF
C233 "C3216X7S2A225K160AB" 1206_180 333,2561 r180 bottom value=2.2uF
C234 "GRM188R61A475MAAJ" 0603 1145.5,880 r0 top value=4.7uF
C235 "885012206052" 0603 1145.5,880 r0 bottom value=1uF
C236 "885012206052" 0603 1075,944 r0 bottom value=1uF
C237 "0402YC101KAT2A" 0402 1364,1902 r180 bottom value=100pF
C238 "0402YC101KAT2A" 0402 923,1915 r180 bottom value=100pF
C239 "0402YC101KAT2A" 0402 1392,1255 r90 bottom value=100pF
C240 "0402YC101KAT2A" 0402 990,1259.38 r90 bottom value=100pF
C241 "C2012X7S2A105K125AB" 0805_HV 241,3095 r0 bottom value=1uF
C242 "GRM155R61E104KA87D" 0402 1122.38,1737 r0 bottom value=0.1uF
C243 "885012206048" 0603 614,1650 r0 bottom value=0.22uF
C244 "GRM155R61E104KA87D" 0402 202,2859 r0 top value=0.1uF
D1 "HSMA-C190" HSMx-C190_Amber 911,110 r0 bottom value=Amber
D2 "HSMA-C190" HSMx-C190_Amber 1284,89 r180 bottom value=Amber
D3 "STPS1150A" SMA 415,3220 r0 bottom value=150V
D4 "1N4148X-TP" SOD-523 1371,2924 r180 bottom value=75V
D5 "1N4148X-TP" SOD-523 1465,3349 r0 bottom value=75V
D6 "STPS1150A" SMA 307,2988 r0 bottom value=150V
D7 "1N4148X-TP" SOD-523 645,1269 r90 top value=75V
D8 "1N4148X-TP" SOD-523 604.65,1594 r180 bottom value=75V
D9 "HSMA-C190" HSMx-C190_Amber 910.47,46 r0 bottom value=Amber
D10 "1N4148X-TP" SOD-523 1337,1992 r90 bottom value=75V
D11 "1N4148X-TP" SOD-523 920,1966 r0 bottom value=75V
D12 "1N4148X-TP" SOD-523 1340,1305 r90 bottom value=75V
D13 "1N4148X-TP" SOD-523 939,1309.65 r90 bottom value=75V
D14 "1N4148X-TP" SOD-523 700.35,2195 r180 bottom value=75V
D15 "1N4148X-TP" SOD-523 606,1791 r90 bottom value=75V
D16 "1N4148X-TP" SOD-523 1138,2472 r90 bottom value=75V
D17 "1N4148X-TP" SOD-523 487,1653 r0 bottom value=75V
D18 "1N4148X-TP" SOD-523 1645,2938 r0 bottom value=75V
GND "TESTPOINT" TP_50MIL-25MILHOLE 796,196 r90 bottom locked
J1 "AXK5S80347YG" Panasonic_AXK5S80347Y 219.98,543.54 r90 top locked
J2 "AXK5S80347YG" Panasonic_AXK5S80347Y 1551.04,543.54 r90 top locked
J3 "632723300011" Wurth_632_723_300_011 560,2 r0 top locked
J4 "CBS1.50X1.75" SHIELD_CBS1P50X1P75 885,2051 r90 top locked
L1 "74404084101" WE-LQS_8040 806,3375 r180 bottom value=100uH
L2 "CDH3D13SHPNP-100MC" 0805_HV 53,3229 r270 bottom value=10uH
L3 "744043102" WE-TPC_4828 508,3425 r0 bottom value=1mH
L4 "744043102" WE-TPC_4828 341,2810 r0 bottom value=1mH
L5 "CDH3D13SHPNP-100MC" 0805_HV 247.2,2656.5 r180 bottom value=10uH
L6 "33 uH, 0.9 A" WE-TPC_5828 1344,1336 r90 top
L7 "742792609" 0603 1439,1089 r270 bottom value="30 ohm"
L8 "742792609" 0603 1637,1114.5 r270 bottom value="30 ohm"
L9 "782633601" 0603 1699,1114.5 r270 bottom value="600 ohm"
L10 "782633601" 0603 1375,1089 r270 bottom value="600 ohm"
L11 "33 uH, 0.9 A" WE-TPC_5828 563,2171.3 r180 top
L12 "742792609" 0603 300,384 r270 bottom value="30 ohm"
L13 "2.2 uH, 3.4 A" WE-TPC_6823 1155,2484 r90 top
L14 "742792609" 0603 47,492 r90 top value="30 ohm"
L15 "742792609" 0603 1677,679 r180 bottom value="30 ohm"
L16 "742792609" 0603 1562,791 r270 bottom value="30 ohm"
L17 "6.8 uH, 2.5 A" WE-LQS_5040 948,1325 r0 top
L18 "742792609" 0603 1200,1083.5 r270 bottom value="30 ohm"
L19 "15 uH, 2 A" WE-LQS_5040 313,1541 r90 top
L20 "742792609" 0603 541,540.24 r270 top value="30 ohm"
L21 "742792609" 0603 451,216 r270 bottom value="30 ohm"
L22 "742792609" 0603 883,1076 r225 bottom value="30 ohm"
L23 "782633601" 0603 1069.27,1056 r270 bottom value="600 ohm"
L24 "33 uH, 0.9 A" WE-TPC_5828 1338,2023 r90 top
L25 "33 uH, 0.9 A" WE-TPC_5828 889,2024 r90 top
L26 "742792609" 0603 88,853 r180 bottom value="30 ohm"
L27 "33 uH, 0.9 A" WE-TPC_5828 546,1812 r180 top
L28 "742792609" 0603 303,1039 r270 bottom value="30 ohm"
L29 "742792609" 0603 409.69,2836.51 r90 top value="30 ohm"
L30 "742792609" 0603 180,726 r180 bottom value="30 ohm"
L31 "742792609" 0603 220,581 r90 bottom value="30 ohm"
L32 "742792609" 0603 657,2848 r180 bottom value="30 ohm"
L33 "742792609" 0603 526,2847 r0 bottom value="30 ohm"
L34 "742792609" 0603 465,1043 r0 bottom value="30 ohm"
L35 "742792609" 0603 1132,1056 r270 bottom value="30 ohm"
L36 "742792609" 0603 96,657 r180 bottom value="30 ohm"
L37 "742792609" 0603 1714,923 r270 bottom value="30 ohm"
L38 "742792609" 0603 267,80 r270 bottom value="30 ohm"
L39 "742792609" 0603 195,78 r270 bottom value="30 ohm"
L40 "742792609" 0603 1727,782 r90 top value="30 ohm"
L41 "742792609" 0603 137,271 r270 bottom value="30 ohm"
L42 "742792609" 0603 1572,984.5 r270 bottom value="30 ohm"
L43 "742792609" 0603 48,986 r270 top value="30 ohm"
L44 "742792609" 0603 316.28,2879.18 r0 top value="30 ohm"
Logo1 "WEEE logo" WEEE_Minimum 457,3222 r0 top
Logo2 "Pb-Free Symbol" Pb-Free_Overlay_Small 959,798 r0 top
Logo3 "FCC disclaimer" FCC_disclaimer -1364,1654 r90 top
LOGO4 "CE Mark" CE_Mark_5mm 171,3142 r0 top
Logo5 "Texas Instruments" TI_Stacked_Overlay_Small 1292,3210 r0 top
LOGO6 "DANGER HIGH VOLTAGE" IEC_HighVoltage_Small 152,3413 r0 top
Logo10 "ESD Susceptible" ESD_Overlay_Small 745,1014 r0 top
Q1 "CSD19538Q3A" DNH0008A 699.39,3111 r180 bottom locked value=100V
Q2 "FMMT495TA" SOT-23 84,3013 r180 bottom value="150 V"
Q3 "FMMT596TA" SOT-23 66,2692 r90 bottom value="200 V"
R1 "ERJ-2RKF1002X" 0402 1336,726 r180 bottom value=10.0k
R2 "ERJ-2RKF1002X" 0402 1365,567 r180 bottom value=10.0k
R3 "ERJ-2RKF1002X" 0402 1133,367 r0 bottom value=10.0k
R4 "ERJ-2RKF1002X" 0402 1365,565 r180 top value=10.0k
R5 "ERJ-2RKF1002X" 0402 1365,407 r180 top value=10.0k
R6 "ERJ-2RKF4701X" 0402 1336,677 r180 bottom value=4.70k
R7 "CRCW04026K04FKED" 0402 1393,355 r0 bottom value=6.04k
R8 "ERJ-2RKF4701X" 0402 1121,129 r90 top value=4.70k
R9 "CRCW0603200RFKEA" 0603 889,660 r0 top value=200
R10 "ERJ-2RKF4701X" 0402 842,411 r0 top value=4.70k
R11 "ERJ-2RKF4701X" 0402 1029.38,367 r0 bottom value=4.70k
R12 "ERJ-2RKF2201X" 0402 1314.5,842.62 r270 top value=2.20k
R13 "ERJ-2RKF2201X" 0402 1264.5,842 r270 top value=2.20k
R14 "ERJ-2RKF3300X" 0402 930,167 r180 bottom value=330
R15 "ERJ-2GE0R00X" 0402 842,460 r180 top value=0
R16 "ERJ-2GE0R00X" 0402 842,361 r180 top value=0
R17 "ERJ-2GE0R00X" 0402 843,312 r180 top value=0
R18 "RC0201DR-074K7L" 0201 859,589 r180 top value=4.70k
R19 "RC0201DR-074K7L" 0201 1008,690.99 r90 bottom value=4.70k
R20 "RC0201DR-074K7L" 0201 1254,143 r270 top value=4.70k
R21 "RC0201DR-074K7L" 0201 873,264 r180 top value=4.70k
R22 "RC0201DR-074K7L" 0201 1017,147 r270 top value=4.70k
R23 "RC0201DR-074K7L" 0201 978,146 r270 top value=4.70k
R24 "ERJ-2GE0R00X" 0402 842,509 r180 top value=0
R25 "ERJ-2GE0R00X" 0402 969,884 r90 bottom value=0
R26 "ERJ-2RKF3300X" 0402 1365,112 r270 bottom value=330
R27 "RC0201DR-074K7L" 0201 859,552 r0 top value=4.70k
R28 "RC0201DR-074K7L" 0201 1021,679 r180 top value=4.70k
R29 "RC0201DR-074K7L" 0201 1218,143 r90 top value=4.70k
R30 "RC0201DR-074K7L" 0201 886,214 r90 top value=4.70k
R31 "RC0201DR-074K7L" 0201 1053,147 r90 top value=4.70k
R32 "RC0201DR-074K7L" 0201 942,146 r90 top value=4.70k
R33 "RT0603BRD0720RL" 0603 1360,3365 r90 bottom value=20.0
R34 "RC0603JR-070RL" 0603 1371,2983 r180 bottom value=0
R35 "CRCW0603100RJNEA" 0603 658,2971 r90 bottom value=100
R36 "RC0603JR-0733KL" 0603 1463,3406 r180 bottom value=33k
R37 "CRCW0603100KJNEAC" 0603 34,3451.07 r270 bottom value=100k
R38 "CRCW0603200RFKEA" 0603 998,3071 r180 top value=200
R39 "RC0603FR-0768KL" 0603 1463.5,3225 r180 bottom value=68.0k
R40 "ERJ-2RKF4701X" 0402 1682,3264 r0 bottom value=4.70k
R41 "ERJ-L1DKF50MU" 2010 918,3142 r180 bottom value=50m
R42 "RT0603BRD07298KL" 0603 1634.5,2996.39 r0 bottom value=298k
R43 "ERJ-2RKF3300X" 0402 894,248.38 r270 bottom value=330
R44 "CRCW0603100KJNEAC" 0603 403,2732 r0 top value=100k
R45 "RG1608P-4751-B-T5" 0603 1634.5,3060 r180 bottom value=4.75k
R46 "CRCW0402100KJNED" 0402 1329,1686 r270 top value=100k
R47 "ERJ-2GE0R00X" 0402 1428,1687 r270 top value=0
R48 "ERJ-2GE0R00X" 0402 1378,1687 r270 top value=0
R49 "RMCF0603ZT0R00" 0603 1525,1672.5 r180 top value=0
R50 "ERJ-2RKF4991X" 0402 1459,1491 r0 top value=4.99k
R51 "RK73H1ETTP1002F" 0402 1458,1541 r180 top value=10.0k
R52 "CRCW0402130RJNED" 0402 1417,1436 r180 bottom value=130
R53 "CRCW0402100KJNED" 0402 931,1692.5 r270 top value=100k
R54 "5106" 5106 1621,3447 r90 bottom value=0
R55 "ERJ-2GE0R00X" 0402 980,1692.5 r270 top value=0
R56 "RMCF0603ZT0R00" 0603 1121,1672.5 r180 top value=0
R57 "CRCW040212K4FKED" 0402 1056.62,1485 r0 top value=12.4k
R58 "RK73H1ETTP1002F" 0402 1056.62,1535 r180 top value=10.0k
R59 "CRCW0402160RJNED" 0402 1015,1439 r180 bottom value=160
R60 "CRCW0402383KFKED" 0402 1340,1407 r270 bottom value=383k
R61 "CRCW0402383KFKED" 0402 939,1412 r270 bottom value=383k
R62 "CRCW0402100KJNED" 0402 1376,2387 r270 top value=100k
R63 "ERJ-2GE0R00X" 0402 1507.62,2415 r180 top value=0
R64 "ERJ-2GE0R00X" 0402 1425,2404.62 r270 top value=0
R65 "RMCF0603ZT0R00" 0603 1517,2359 r180 top value=0
R66 "CRCW0402100KJNED" 0402 166,2140 r0 bottom value=100k
R67 "ERJ-2GE0R00X" 0402 606,1418 r0 top value=0
R68 "ERJ-2GE0R00X" 0402 716,2931.62 r90 bottom value=0
R69 "ERJ-2GE0R00X" 0402 166,2189 r0 bottom value=0
R70 "ERJ-2GE0R00X" 0402 745,2827 r90 bottom value=0
R71 "5106" 5106 1706,3447 r90 bottom value=0
R72 "RMCF0603ZT0R00" 0603 306,2433 r0 bottom value=0
R73 "ERJ-2GE0R00X" 0402 985.62,2848 r180 top value=0
R74 "ERJ-2RKF4991X" 0402 333.62,2074 r180 top value=4.99k
R75 "ERJ-2GE0R00X" 0402 879,2752 r90 bottom value=0
R76 "RK73H1ETTP1002F" 0402 412,2087 r90 top value=10.0k
R77 "ERJ-2RKF1002X" 0402 845,2620.38 r90 bottom value=10.0k
R78 "ERJ-2RKF1002X" 0402 894,2620.38 r90 bottom value=10.0k
R79 "ERJ-2GE0R00X" 0402 610.76,2498 r180 bottom value=0
R80 "ERJ-2GE0R00X" 0402 879,2752 r90 top value=0
R81 "ERJ-2GE0R00X" 0402 611,2547 r0 bottom value=0
R82 "CRCW040218R0JNED" 0402 554,2647.62 r270 top value=18
R83 "CRCW040218R0JNED" 0402 601.38,2385 r0 top value=18
R84 "CRCW040218R0JNED" 0402 706,2329 r180 top value=18
R85 "CRCW040218R0JNED" 0402 664,2611 r0 bottom value=18
R86 "CRCW040218R0JNED" 0402 701.96,2670.14 r0 bottom value=18
R87 "CRCW040218R0JNED" 0402 693,2524.38 r270 bottom value=18
R88 "CRCW040218R0JNED" 0402 742,2524.38 r270 bottom value=18
R89 "CRCW040218R0JNED" 0402 791,2524.38 r270 bottom value=18
R90 "ERJ-2RKF2003X" 0402 659,670.38 r270 bottom value=200k
R91 "CRCW0402100KJNED" 0402 1065.5,2854.62 r270 top value=100k
R92 "ERJ-2GE0R00X" 0402 1164,2854.62 r270 top value=0
R93 "CRCW040244K2FKED" 0402 1507.62,2863 r0 top value=44.2k
R94 "ERJ-2GE0R00X" 0402 1114.5,2854.62 r270 top value=0
R95 "ERJ-1GE0R00C" 0201 1147.01,1786 r180 top value=0
R96 "RMCF0603ZT0R00" 0603 1256.5,2849 r180 top value=0
R97 "ERJ-2RKF4991X" 0402 1207,2702 r90 top value=4.99k
R98 "RK73H1ETTP1002F" 0402 1158,2702 r270 top value=10.0k
R99 "ERJ-2GE0R00X" 0402 1368.5,2812.24 r90 bottom value=0
R100 "CRCW0402383KFKED" 0402 1137,2577 r270 bottom value=383k
R101 "CRCW0402130RJNED" 0402 1213,2606 r180 bottom value=130
R102 "ERJ-1GE0R00C" 0201 1081,1734.99 r270 top value=0
R103 "RC0402FR-073K57L" 0402 1427.5,2593 r0 top value=3.57k
R104 "ERJ-2RKF4991X" 0402 1480,2214.38 r90 top value=4.99k
R105 "RK73H1ETTP1002F" 0402 1431,2214.38 r270 top value=10.0k
R106 "CRCW0402383KFKED" 0402 1336,2094 r270 bottom value=383k
R107 "CRCW0402130RJNED" 0402 1413,2128 r180 bottom value=130
R108 "CRCW0402100KJNED" 0402 947.04,2351.93 r180 top value=100k
R109 "ERJ-2GE0R00X" 0402 842.98,2380.52 r0 top value=0
R110 "ERJ-2GE0R00X" 0402 947.4,2400.53 r180 top value=0
R111 "CRCW04022K87FKED" 0402 1428.5,2643 r180 top value=2.87k
R112 "RMCF0603ZT0R00" 0603 1174,2254.5 r270 top value=0
R113 "ERJ-2GE0R00X" 0402 1511,1849 r180 top value=0
R114 "ERA-2AEB752X" 0402 1029,2210 r90 top value=7.50k
R115 "RK73H1ETTP1002F" 0402 979,2210 r270 top value=10.0k
R116 "CRCW0402383KFKED" 0402 886,2091 r270 bottom value=383k
R117 "RC0201JR-0722RL" 0201 1373,182 r0 top value=22
R118 "CRCW0402150RJNED" 0402 962.62,2122 r180 bottom value=150
R119 "CRCW0402383KFKED" 0402 483.94,2151.77 r0 bottom value=383k
R120 "ERJ-2GE0R00X" 0402 709.88,1687.02 r270 top value=0
R121 "CRCW0402130RJNED" 0402 483.94,2200.38 r180 bottom value=130
R122 "RC0201JR-0722RL" 0201 1477,61 r180 top value=22
R123 "CRCW040222R0JNED" 0402 1672.88,2857.84 r90 bottom value=22
R124 "CRCW0402100KJNED" 0402 193,1778 r270 bottom value=100k
R125 "RC0201JR-0722RL" 0201 1724,373 r0 top value=22
R126 "5106" 5106 611.98,143.31 r0 bottom value=0
R127 "ERJ-2GE0R00X" 0402 227,1883 r270 bottom value=0
R128 "RMCF0603ZT0R00" 0603 186,1972 r180 bottom value=0
R129 "ERJ-2RKF4991X" 0402 360.38,1908 r180 top value=4.99k
R130 "RC0201JR-0722RL" 0201 1382,218 r0 top value=22
R131 "RK73H1ETTP1002F" 0402 360.38,1859 r0 top value=10.0k
R132 "CRCW0402383KFKED" 0402 480,1773 r0 bottom value=383k
R133 "CRCW0402130RJNED" 0402 453,1849.47 r270 bottom value=130
R134 "RMCF0603ZT0R00" 0603 82,1459 r180 bottom value=0
R135 "ERJ-2GE0R00X" 0402 170,1437 r270 bottom value=0
R136 "ERJ-2GE0R00X" 0402 231,1297 r270 top value=0
R137 "RT0603BRD0710KL" 0603 111,1115 r270 bottom value=10.0k
R138 "CRCW0402301KFKED" 0402 522,1391.38 r270 bottom value=301k
R139 "RT0603DRE07344KL" 0603 484,1594 r0 bottom value=344k
R140 "CRCW060332K4FKEA" 0603 49,1179 r270 bottom value=32.4k
R141 "CPF0603B620KE" CPF0603 489,1528 r180 bottom value=620k
R142 "ERA-2AEB8662X" 0402 422,1392 r90 bottom value=86.6k
R144 "CRCW02014K70FKED" 0201_033 531,2456.01 r270 bottom value=4.70k
R145 "CRCW02014K70FKED" 0201_033 531,2520 r90 bottom value=4.70k
R146 "ERJ-2GE0R00X" 0402 739.74,879.06 r0 top value=0
R147 "ERJ-2GE0R00X" 0402 430,720.38 r90 bottom value=0
R148 "ERJ-2RKF2003X" 0402 506.62,694 r180 bottom value=200k
R149 "RC0201JR-0722RL" 0201 1539,336 r180 bottom value=22
R150 "RC0201JR-0722RL" 0201 1454,312 r180 bottom value=22
R151 "CRCW02014K70FKED" 0201_033 827,1748 r90 top value=4.70k
R152 "CSR1206FK20L0" 1206 819.77,1834.12 r180 top value=0.02
R153 "ERJ-2RKF2003X" 0402 610,957 r90 bottom value=200k
R154 "ERJ-2GE0R00X" 0402 802.38,2823 r0 top value=0
R155 "RC0201JR-0722RL" 0201 1454,276 r180 bottom value=22
R156 "RC0201JR-0722RL" 0201 1539,372 r180 bottom value=22
R157 "ERJ-2GE0R00X" 0402 845,2516.38 r270 bottom value=0
R158 "ERJ-2GE0R00X" 0402 894,2516.76 r270 bottom value=0
R159 "CSR1206FK20L0" 1206 480,2484.09 r90 top value=0.02
R160 "CRCW040218R0JNED" 0402 557.38,2728 r0 top value=18
R161 "ERJ-2RKF2003X" 0402 740,780 r180 top value=200k
R162 "ERJ-2RKF1002X" 0402 837.62,789 r0 bottom value=10.0k
R163 "RT0603BRD0710KL" 0603 272.5,1053 r180 top value=10.0k
R164 "CRCW04025K11FKED" 0402 472.38,1468 r180 bottom value=5.11k
R165 "ERJ-2GE0R00X" 0402 453,1589 r270 top value=0
R166 "CSR1206FK20L0" 1206 307,862.91 r90 bottom value=0.02
R167 "ERJ-1GE0R00C" 0201 1339,1844 r0 top value=0
R168 "CRCW0402909KFKED" 0402 750,979.5 r0 bottom value=909k
R169 "RC0201JR-0722RL" 0201 1723.01,193 r0 top value=22
R170 "ERJ-2RKF4701X" 0402 507,744 r0 bottom value=4.70k
R171 "ERJ-2GE0R00X" 0402 740,830 r180 top value=0
R172 "ERJ-1GE0R00C" 0201 1256.99,1802 r0 top value=0
R173 "ERJ-2GE0R00X" 0402 868.62,902 r180 top value=0
R174 "ERJ-2RKF2003X" 0402 381.77,720.46 r90 bottom value=200k
R175 "ERJ-1GE0R00C" 0201 1384,1775 r270 top value=0
R176 "ERJ-2RKF4701X" 0402 659,958 r90 bottom value=4.70k
R177 "ERJ-2RKF4701X" 0402 740,730 r180 top value=4.70k
R178 "ERJ-2RKF4701X" 0402 741,681 r180 top value=4.70k
R179 "CRCW040210K0FKED" 0402 610,957 r270 top value=10.0k
R180 "ERJ-2GE0R00X" 0402 376,613.65 r270 bottom value=0
R181 "ERJ-2GE0R00X" 0402 781,1524 r270 bottom value=0
R182 "ERJ-2RKF4701X" 0402 426,613.65 r270 bottom value=4.70k
R183 "CRCW02014K70FKED" 0201_033 790,1748 r90 top value=4.70k
R184 "ERJ-1GN0R00C" 0201 878.99,1760 r0 bottom value=0
R185 "RC0201FS-7D10KL" 0201 184,2269 r90 top value=10.0k
R186 "RC0201FS-7D10KL" 0201 197.01,2319 r180 top value=10.0k
R187 "ERJ-1GE0R00C" 0201 1197,1793.01 r90 top value=0
R188 "ERJ-2GE0R00X" 0402 636,1494 r90 top value=0
R189 "RC0201JR-0722RL" 0201 1375.01,312 r0 top value=22
R190 "RG1608P-1023-B-T5" 0603 757,1194 r0 bottom value=102k
R191 "ERJ-2GE0R00X" 0402 781,1492 r270 top value=0
R192 "RC0201JR-0722RL" 0201 1723.01,157 r0 top value=22
R193 "RC0201JR-0722RL" 0201 1723,265 r0 top value=22
R194 "RC0201JR-0722RL" 0201 1723,229 r0 top value=22
R195 "CRCW060342K2FKEA" 0603 142.5,1053 r0 top value=42.2k